# Altium PCB medusa-ai-integrated.PcbDoc (part 1 of 2)
Units mil, origin at the board's own origin, x right, y up, seen from the top; angles counter-clockwise.
Board outline 7750 x 7750 mil, 4 copper layers (Top Layer, Layer 1, Layer 2, Bottom Layer), stack 23.756 mil thick; 101 components, 83 nets, 484 pads, 157 vias.
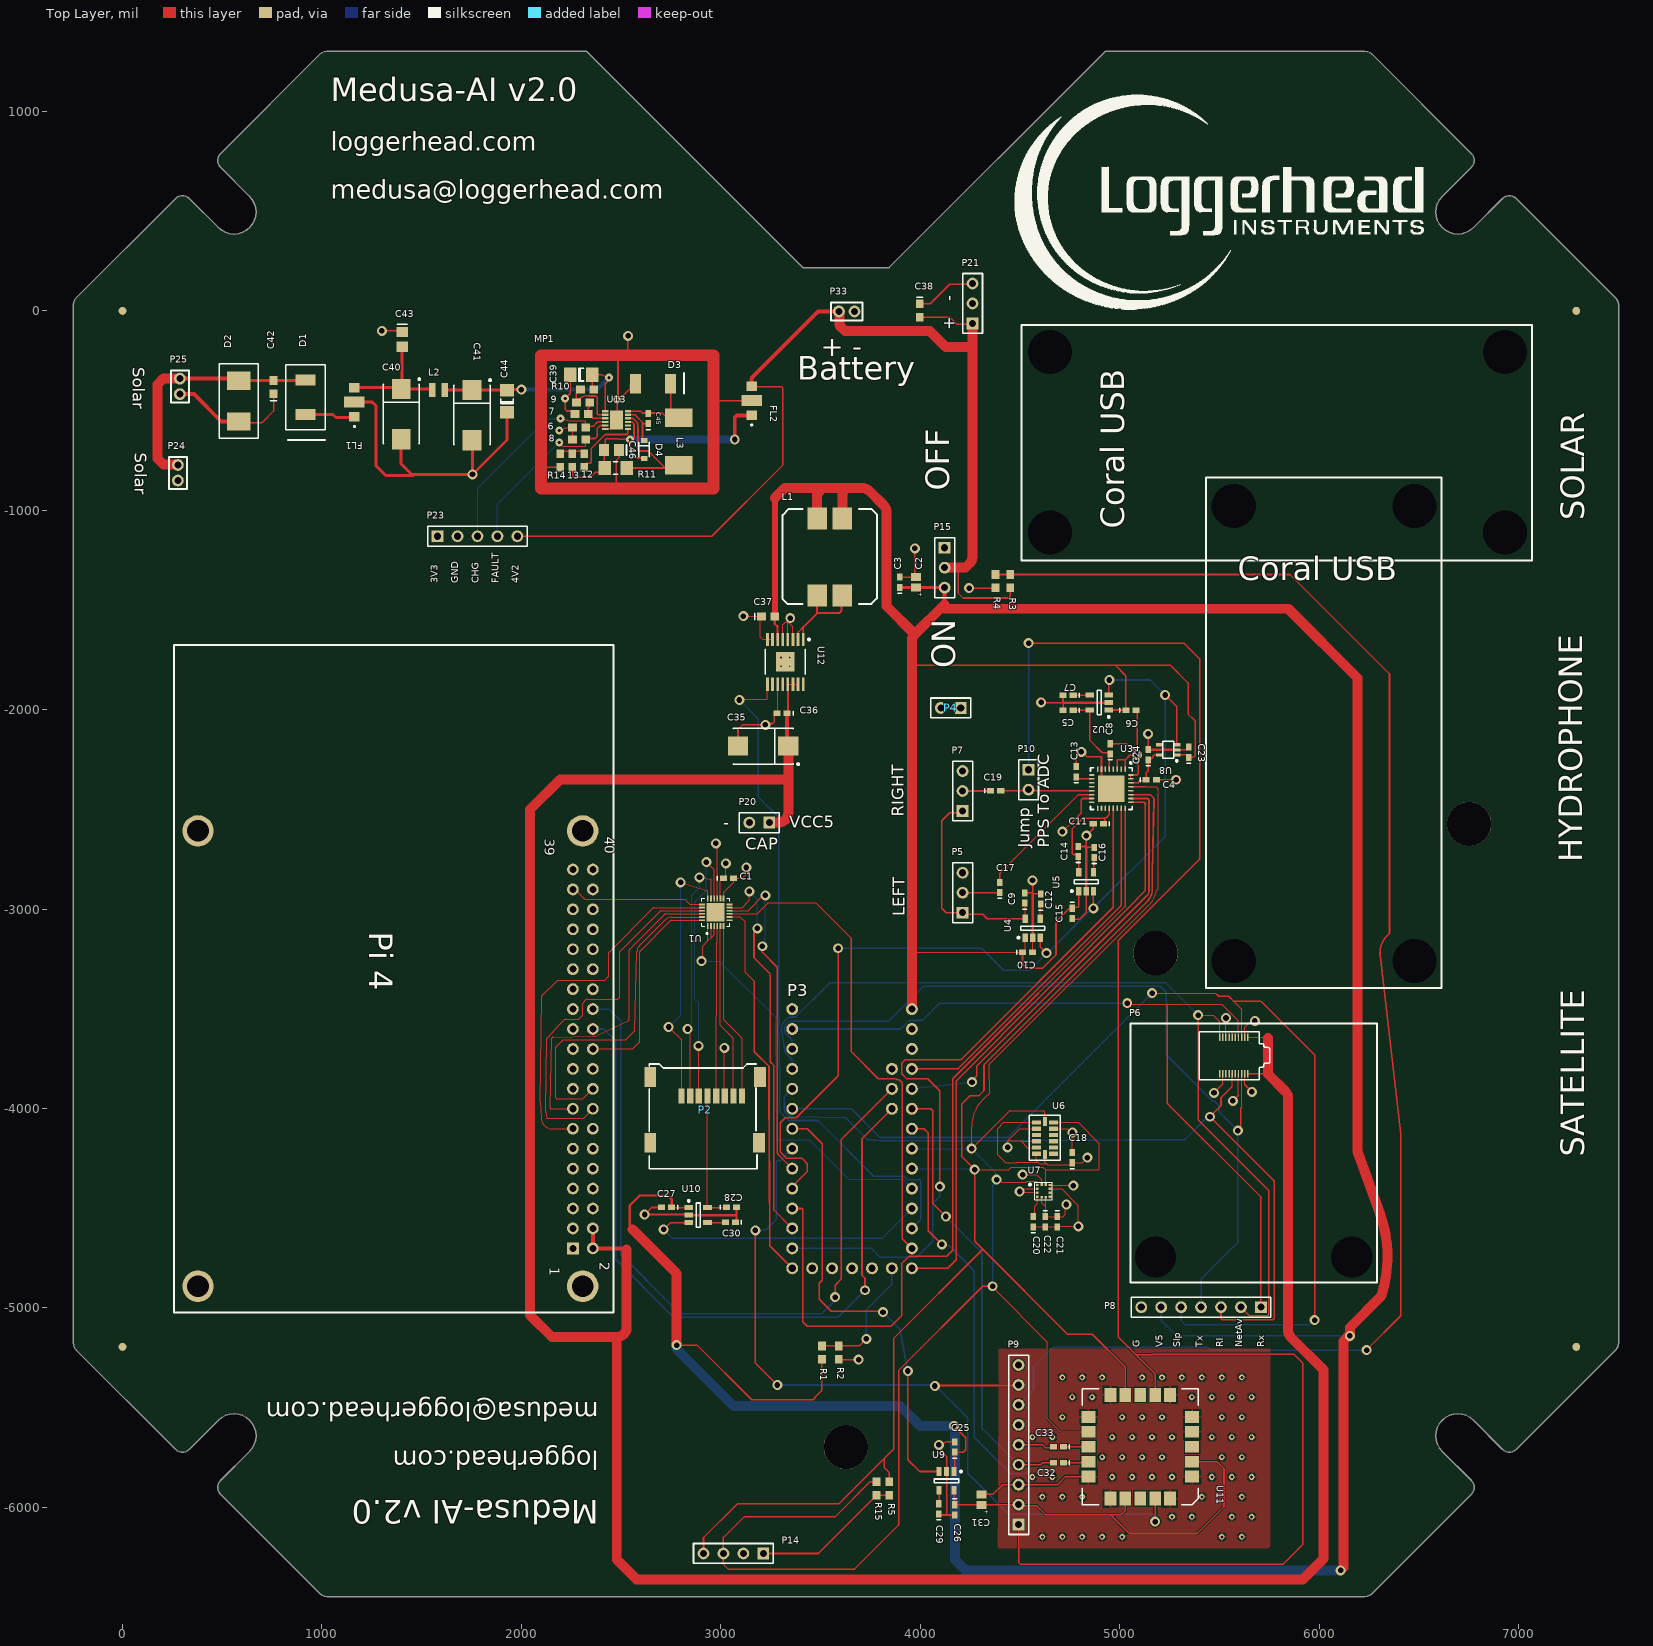
[diagram p0: Top Layer view]
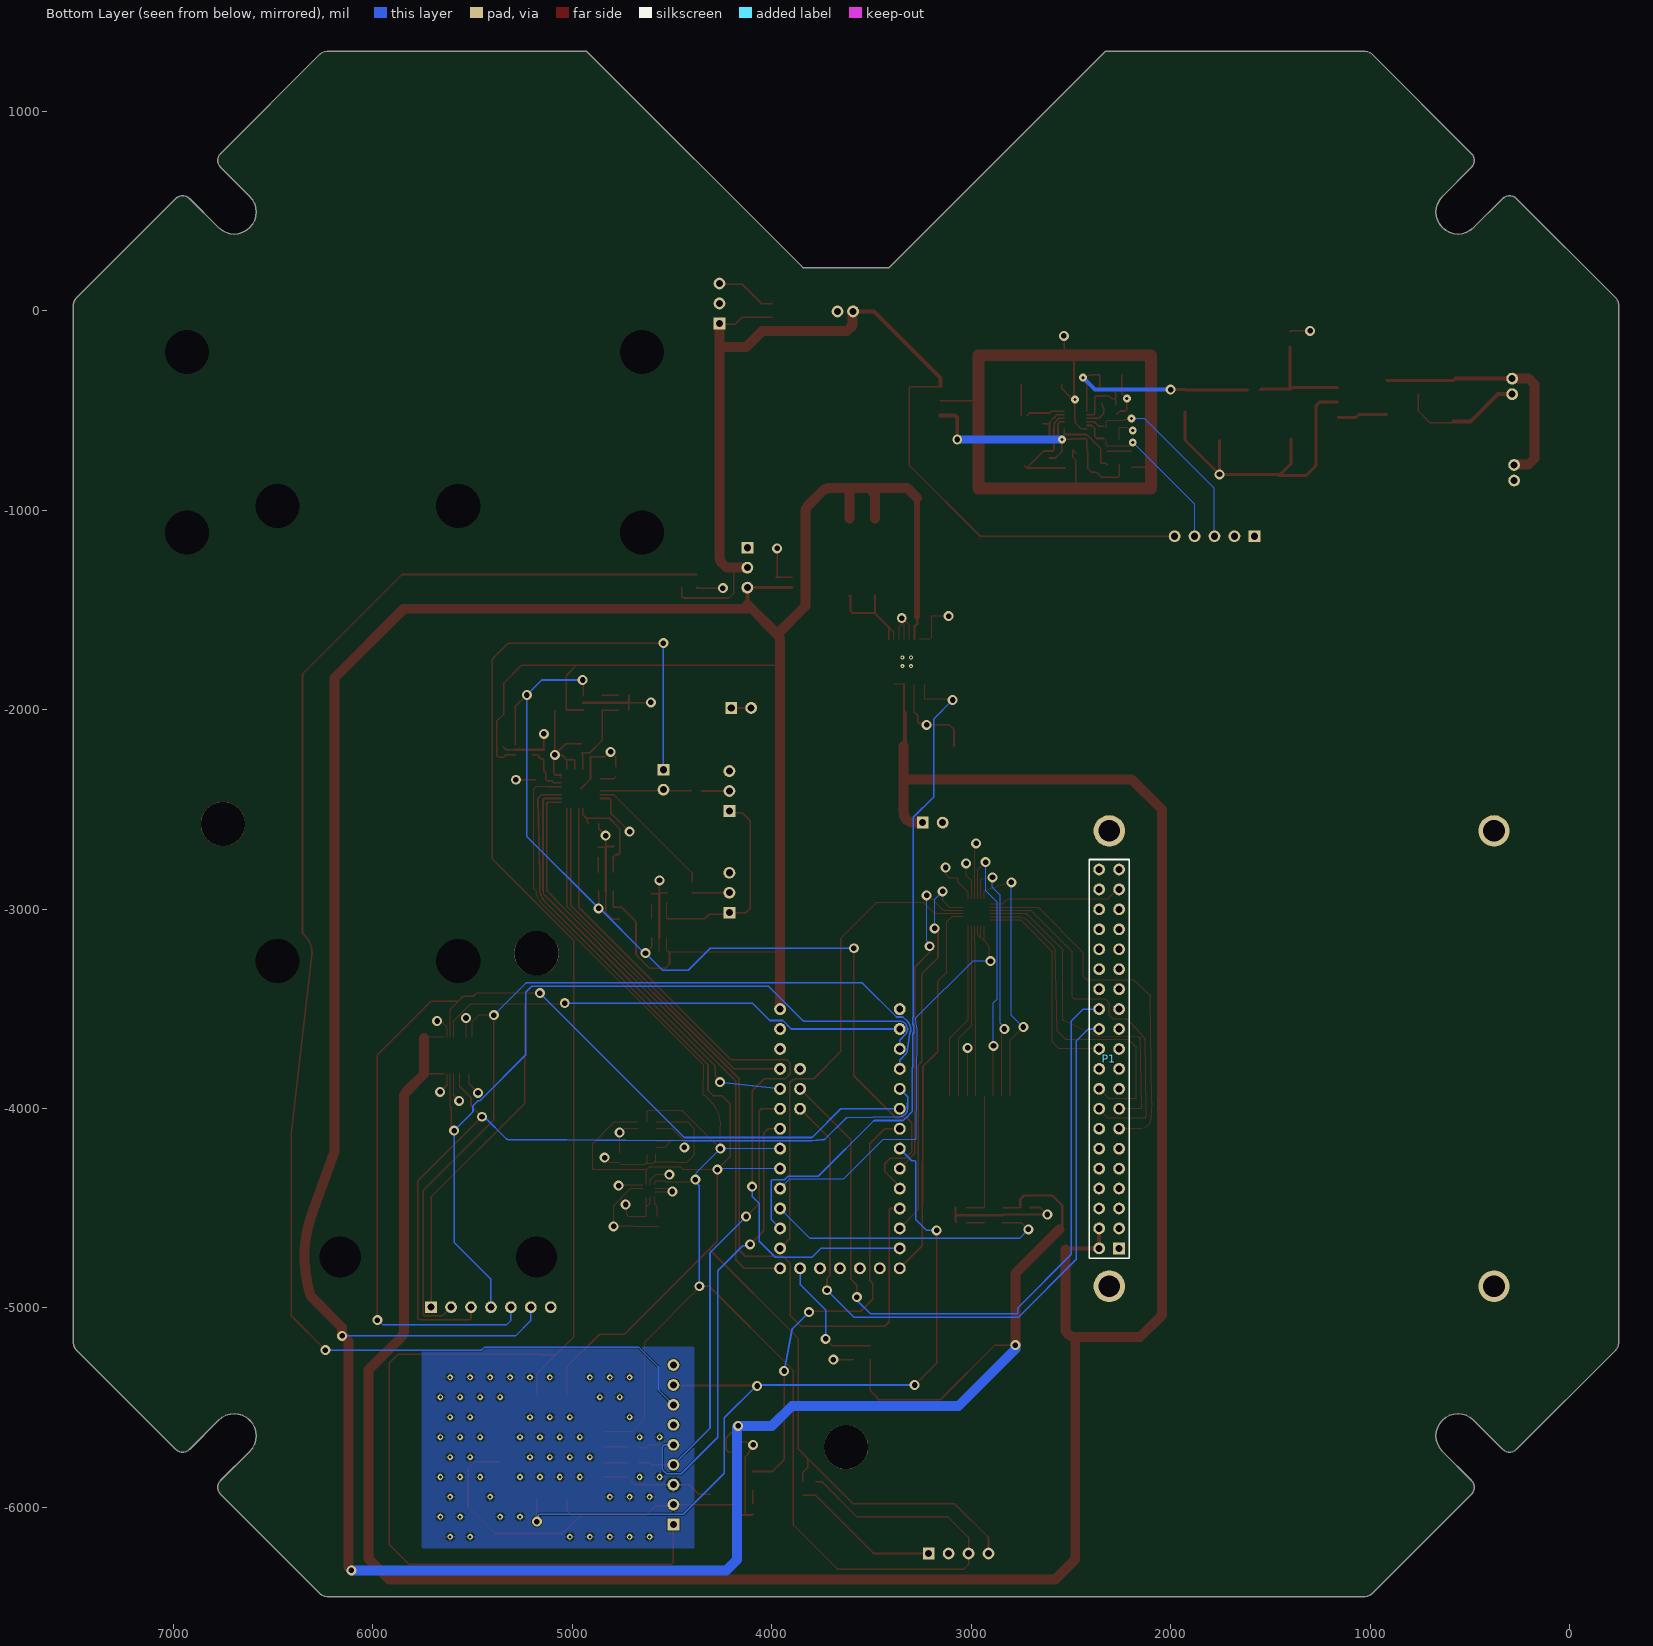
[diagram p1: Bottom Layer view, seen from below]
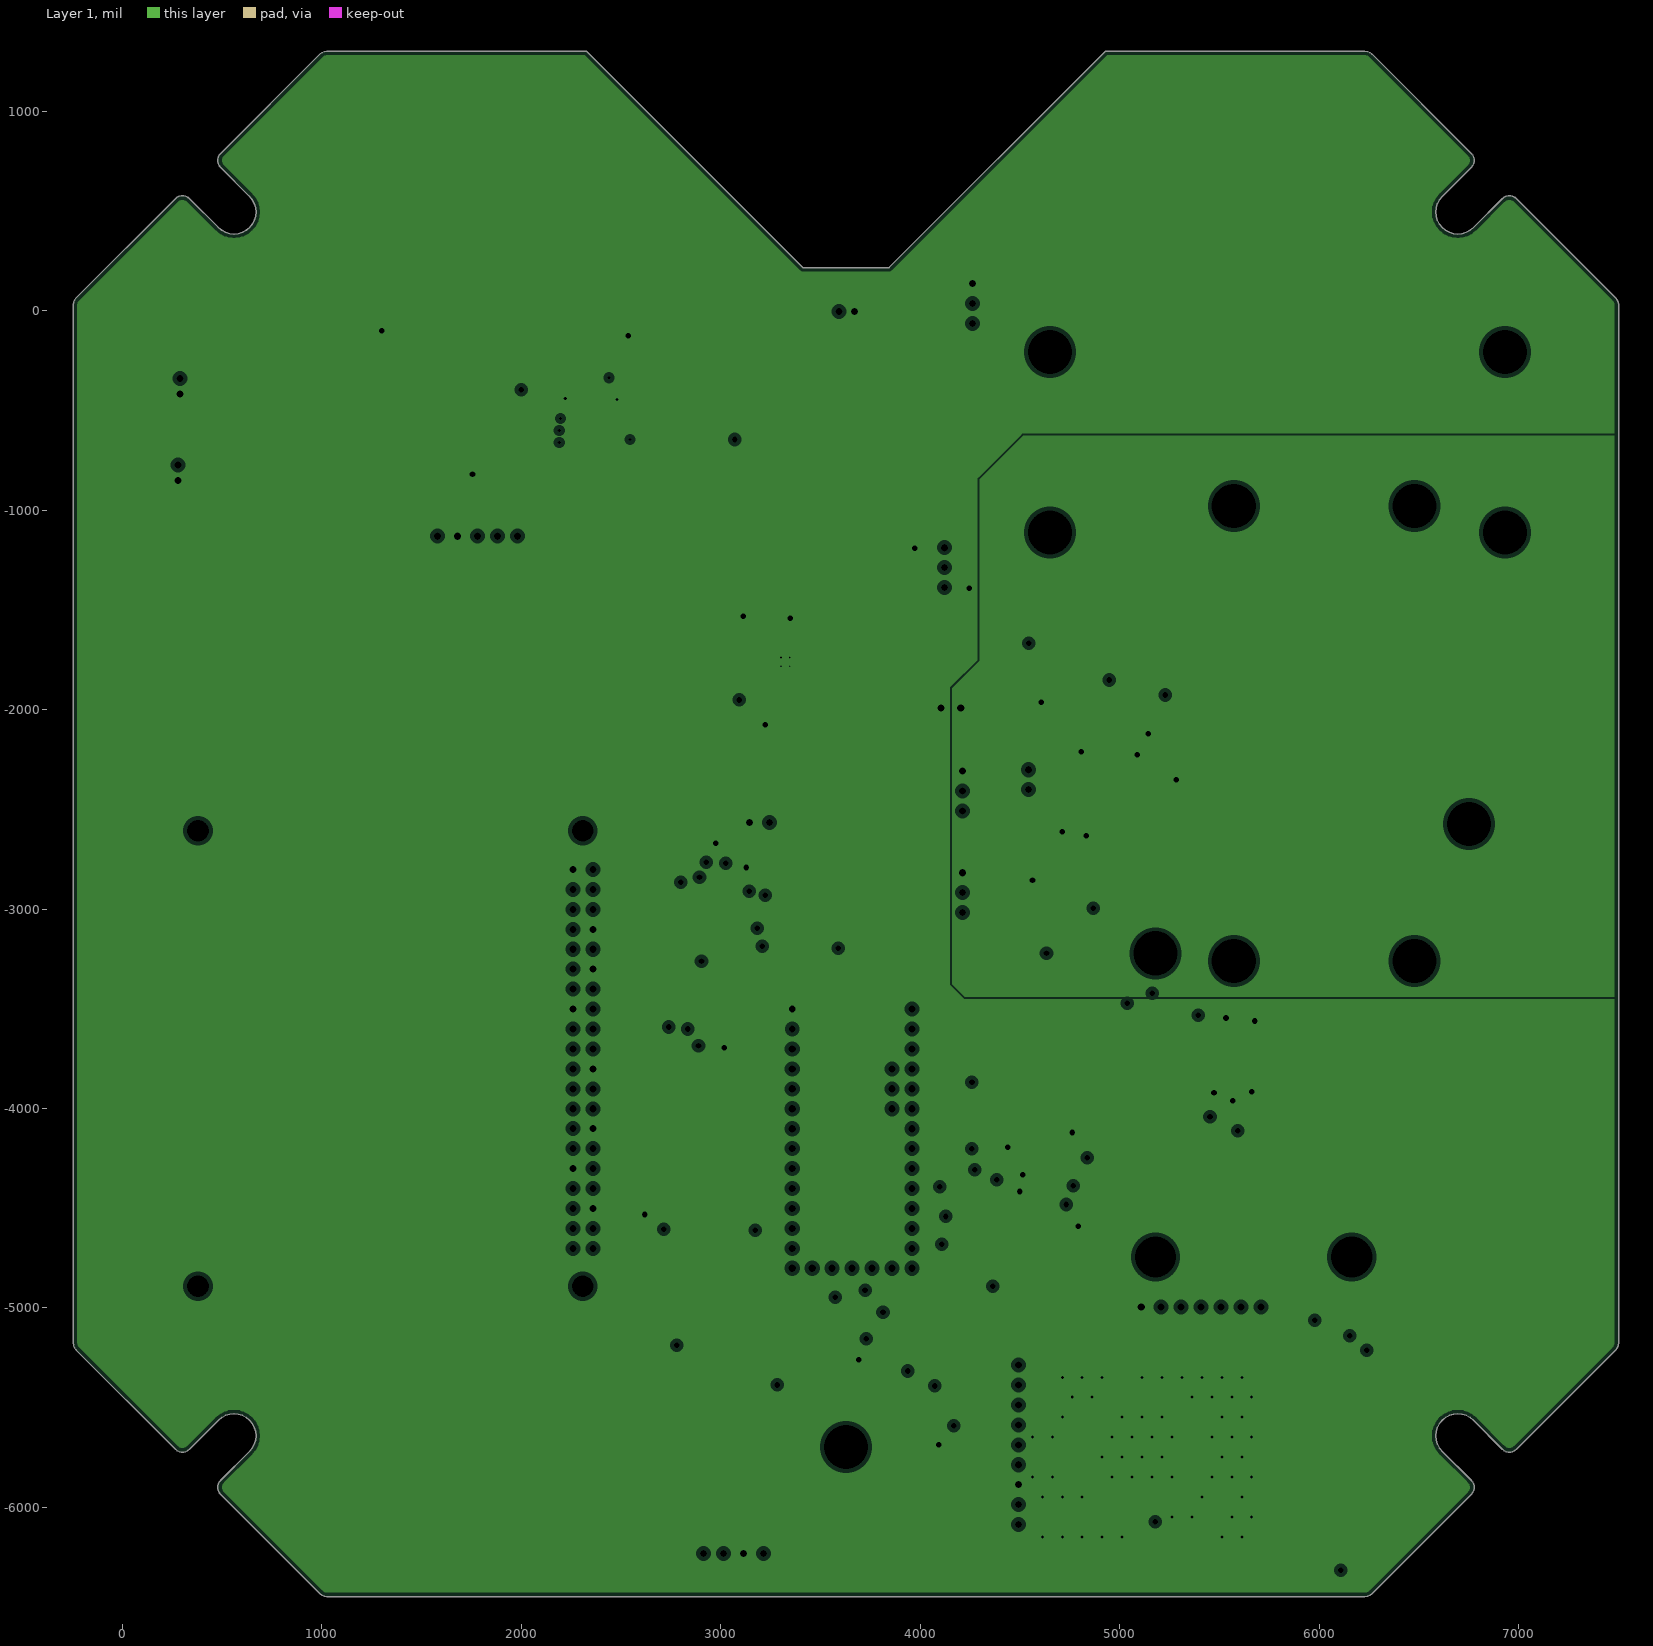
[diagram p2: Layer 1, clearances drawn from the general rule]
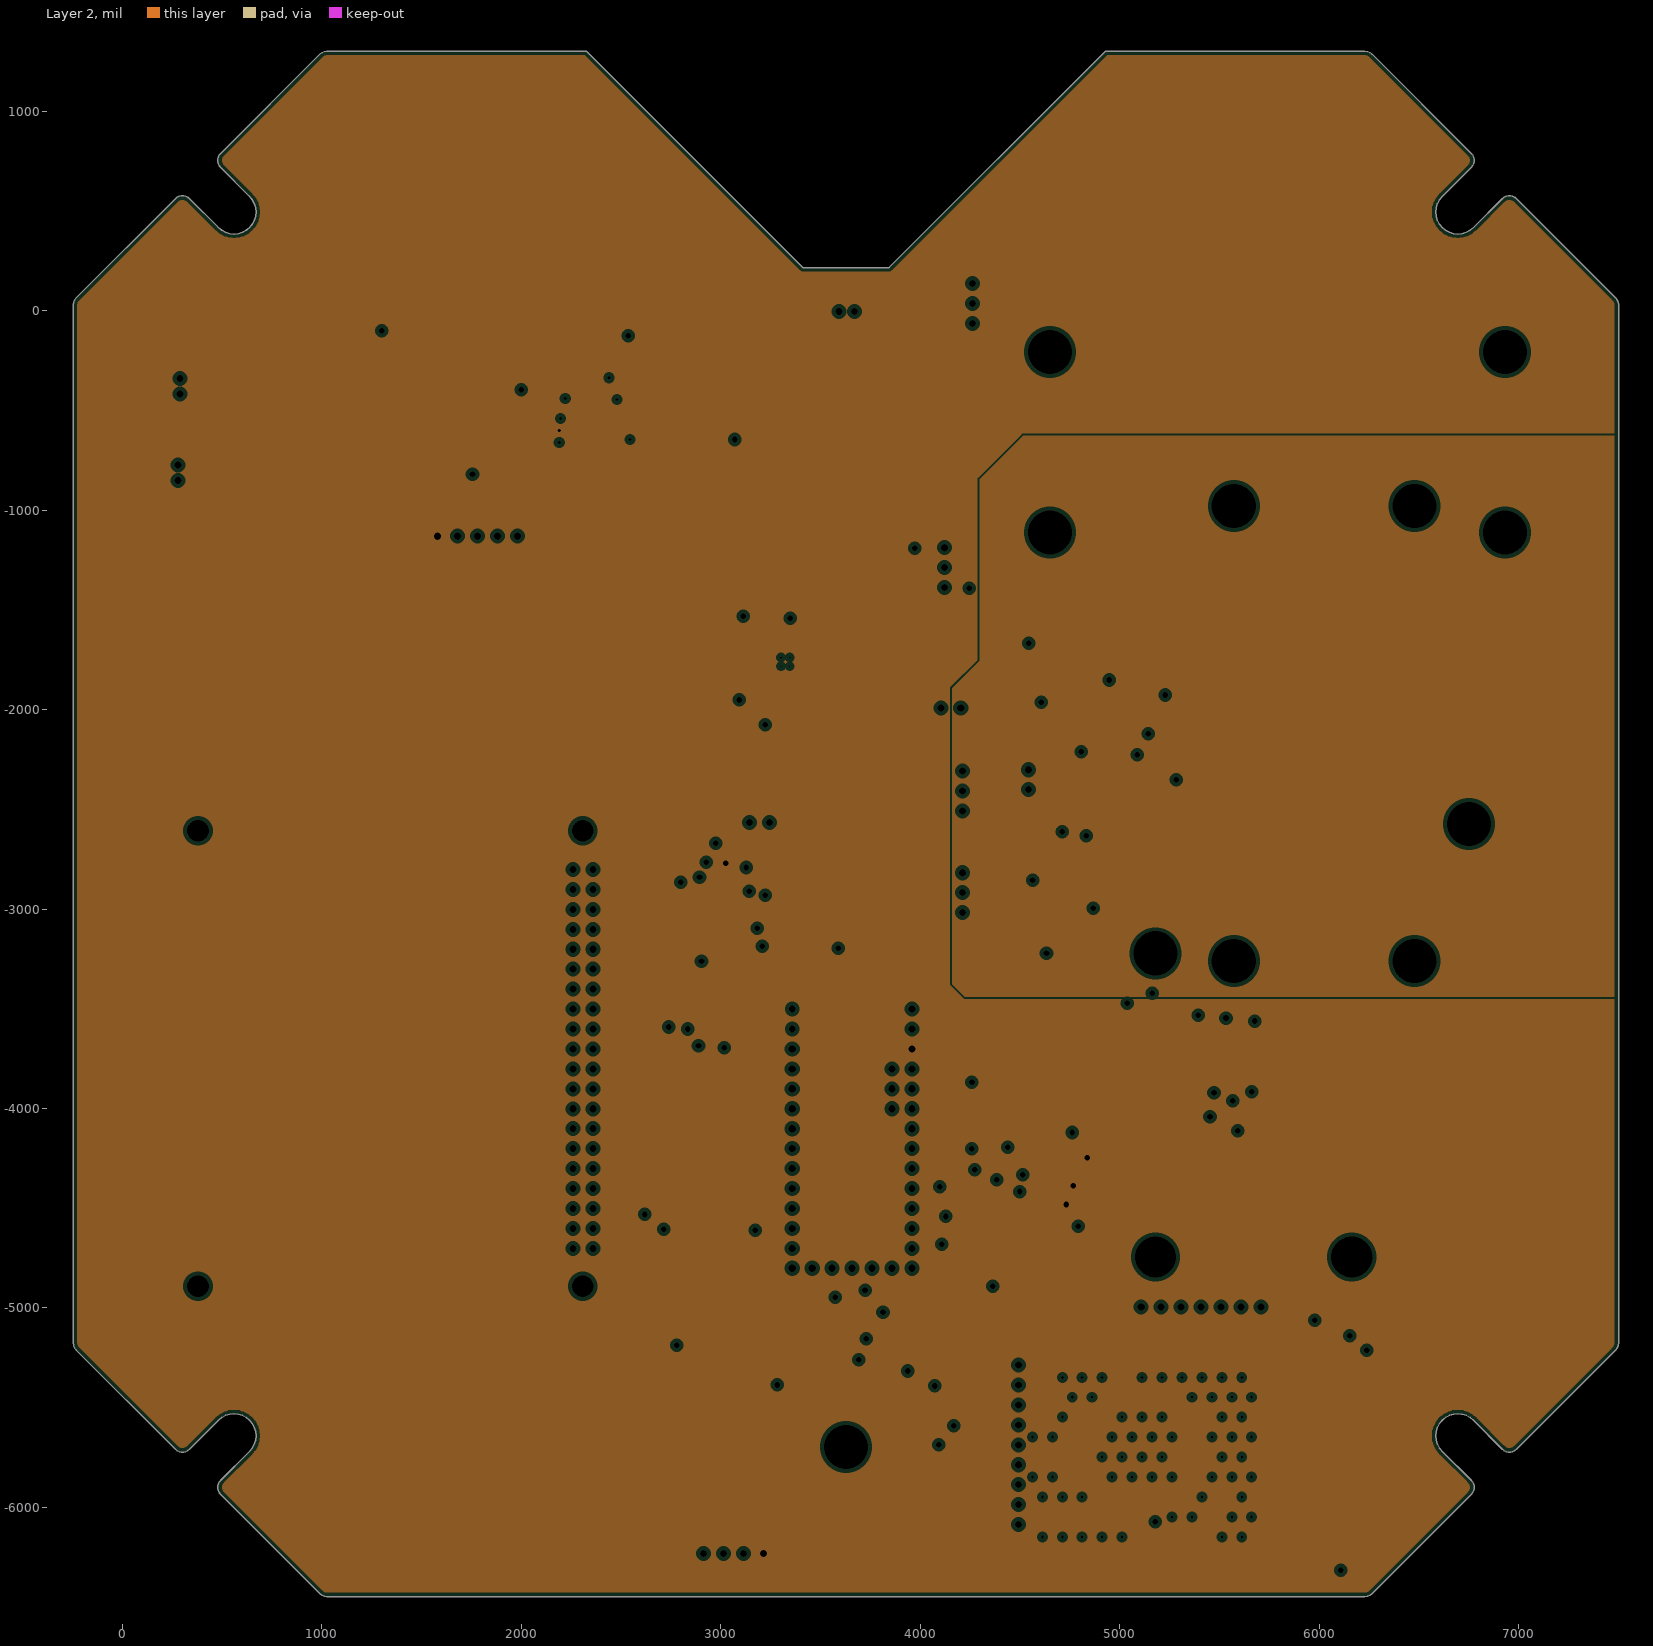
[diagram p3: Layer 2, clearances drawn from the general rule]

## Layer stack, top to bottom
Top Solder: solder mask 0.4, Solder Resist, Dk 3.5
Top Layer: signal copper 1.4
Dielectric 2: prepreg 2.8, PP-006, Dk 4.1
Layer 1: plane copper 1.378, net DGND
Dielectric 1: dielectric 12.6, FR-4, Dk 4.8
Layer 2: plane copper 1.378, net 3V3
Dielectric 3: prepreg 2.8, PP-006, Dk 4.1
Bottom Layer: signal copper 1.4
Bottom Solder: solder mask 0.4, Solder Resist, Dk 3.5

## Board outline
477.66,-5894.11 480.16,-5883.2 485.01,-5873.11 491.99,-5864.36 637.15,-5719.2 650.89,-5702.46 661.1,-5683.36 667.39,-5662.63 669.51,-5641.07 667.39,-5619.51 661.1,-5598.78 650.89,-5579.68 637.15,-5562.93 620.4,-5549.19 601.3,-5538.98 580.57,-5532.69 559.01,-5530.57 537.45,-5532.69 516.72,-5538.98 497.62,-5549.19 480.87,-5562.93 335.72,-5708.08 326.97,-5715.07 316.88,-5719.92 305.97,-5722.42 294.77,-5722.42 283.85,-5719.92 273.77,-5715.07 265.01,-5708.08 -232.91,-5210.16 -240.86,-5199.8 -245.86,-5187.74 -247.56,-5174.8 -247.56,29.53 -245.86,42.47 -240.86,54.53 -232.91,64.88 265.01,562.81 273.77,569.79 283.85,574.65 294.77,577.14 305.97,577.14 316.88,574.65 326.97,569.79 335.72,562.81 480.87,417.66 497.62,403.92 516.72,393.7 537.45,387.42 559.01,385.29 580.57,387.42 601.3,393.7 620.4,403.92 637.14,417.66 650.89,434.4 661.1,453.51 667.39,474.24 669.51,495.79 667.39,517.35 661.1,538.08 650.89,557.18 637.14,573.93 491.99,719.08 485.01,727.83 480.16,737.92 477.66,748.84 477.66,760.03 480.16,770.95 485.01,781.04 491.99,789.79 989.92,1287.72 1000.28,1295.66 1012.34,1300.66 1025.28,1302.36 2326.36,1302.36 3411.36,217.36 3843.52,217.36 4928.52,1302.36 6229.61,1302.36 6242.55,1300.66 6254.61,1295.66 6264.96,1287.72 6762.89,789.79 6769.87,781.04 6774.73,770.95 6777.22,760.03 6777.22,748.84 6774.73,737.92 6769.87,727.83 6762.89,719.08 6617.74,573.93 6603.99,557.18 6593.78,538.08 6587.5,517.35 6585.37,495.79 6587.5,474.24 6593.78,453.51 6603.99,434.4 6617.74,417.66 6634.48,403.92 6653.59,393.71 6674.31,387.42 6695.87,385.29 6717.43,387.42 6738.16,393.71 6757.26,403.92 6774.01,417.66 6919.16,562.81 6927.91,569.79 6938,574.65 6948.92,577.14 6960.11,577.14 6971.03,574.65 6981.12,569.79 6989.87,562.81 7487.8,64.88 7495.74,54.53 7500.74,42.47 7502.44,29.53 7502.44,-5174.8 7500.74,-5187.74 7495.74,-5199.8 7487.8,-5210.16 6989.87,-5708.08 6981.12,-5715.07 6971.03,-5719.92 6960.11,-5722.41 6948.92,-5722.41 6938,-5719.92 6927.91,-5715.07 6919.16,-5708.08 6774.01,-5562.93 6757.26,-5549.19 6738.16,-5538.98 6717.43,-5532.69 6695.87,-5530.57 6674.32,-5532.69 6653.59,-5538.98 6634.48,-5549.19 6617.74,-5562.93 6604,-5579.68 6593.78,-5598.78 6587.5,-5619.51 6585.37,-5641.07 6587.5,-5662.63 6593.78,-5683.36 6604,-5702.46 6617.74,-5719.2 6762.89,-5864.35 6769.87,-5873.11 6774.73,-5883.2 6777.22,-5894.11 6777.22,-5905.31 6774.73,-5916.22 6769.87,-5926.31 6762.89,-5935.07 6264.96,-6432.99 6254.61,-6440.94 6242.55,-6445.93 6229.61,-6447.64 1025.28,-6447.64 1012.34,-6445.93 1000.28,-6440.94 989.92,-6432.99 491.99,-5935.07 485.01,-5926.31 480.16,-5916.22 477.66,-5905.31

## Design rules (kind name [scope] priority, off if disabled: settings)
Clearance [All] p1: gap=5 ignorepadtopadclearanceinfootprint=FALSE except(0: Arc-Hole Track-Hole SMDPad-Hole THPad-Hole Via-Hole Fill-Hole Poly-Hole Region-Hole Text-Hole; 8: Arc-Arc Arc-Track Track-Track)
HoleSize [All] p1: absolutevalues=TRUE maxlimit=300 minlimit=1 maxpercent=80.000 minpercent=20.000
MinimumSolderMaskSliver [All] p1: minsoldermaskwidth=2
PlaneClearance [All] p1: clearance=20
PlaneConnect [All] p1: planeconnectstyle=Relief reliefexpansion=20 reliefentries=4 reliefconductorwidth=10 reliefairgap=10
PolygonConnect [All] p1: connectstyle=Relief reliefconductorwidth=10 reliefentries=4 polygonreliefangle="90 Angle" airgapwidth=10
RoutingVias [All] p1: holewidth=28 width=50 viastyle="Through Hole" minholewidth=28 minwidth=50 maxholewidth=28 maxwidth=50
SilkToSilkClearance [All] p1: silktosilkclearance=1
SolderMaskExpansion [All] p1: expansion=4 istentingtop=FALSE
Width [All] p1: maxlimit=100 minlimit=6 preferedwidth=8
25 further rules are at their usual default settings.

## Classes and differential pairs
component class medusa-ai-sensors: C18 C20 C21 C22 C31 C32 C33 P9 R3 R4 R5 R15 U6 U7 U11
component class medusa-charger: 6 7 8 9 12 13 C38 C39 C40 C41 C42 C43 C44 C45 C46 D1 D2 D3 D4 FL1 FL2 L2 L3 MP1 P21 P23 P24 P25 P33 R10 R11 R14 U13
component class medusa-ai-power: C25 C26 C27 C28 C29 C30 C35 C36 C37 L1 P20 U9 U10 U12
component class medusa-ai-integrated-charger: C1 C2 C3 P1 P2 P3 P6 P8 P14 P15 R1 R2 U1
component class medusa-ai-audio: C4 C5 C6 C7 C8 C9 C10 C11 C12 C13 C14 C15 C16 C17 C19 C23 C24 P4 P5 P7 P10 U2 U3 U4 U5 U8

## Components (designator, comment, footprint, x,y, rotation, side; value= is the part's Value field where it differs from the comment)
6 "330K" 3-0603 2290,-585 r0 top (schematic designator R6)
7 "51K" 3-0603 2302.44,-517.64 r0 top (schematic designator R7)
8 "330K" 3-0603 2290,-645 r0 top (schematic designator R8)
9 "51K" 3-0603 2310,-460 r0 top (schematic designator R9)
12 "205K" 3-0603 2315,-750 r270 top (schematic designator R12)
13 "64K9" 3-0603 2255,-750 r90 top (schematic designator R13)
C1 "0.1uF" 0402 3038.31,-2846.1 r0 top
C2 "10uF" Tant0805 3978.31,-1361.1 r270 top
C3 "0.1uF" 0402 3898.31,-1361.1 r90 top
C4 "0.1uF" 0402 5158.31,-2351.1 r0 top
C5 "0.1uF" 0402 4741.77,-2003.37 r180 top
C6 "1uF" 0402 5056.77,-2003.37 r0 top value=0.1uF
C7 "0.01uF" 0402 4741.77,-1928.37 r180 top value=0.1uF
C8 "0.1uF" 0402 4953.31,-2196.1 r90 top
C9 "0.1uF" 0402 4525.2,-2944.41 r90 top
C10 "1uF" 0402 4538.31,-3216.1 r0 top value=0.1uF
C11 "0.1uF" 0402 4893.31,-2571.1 r180 top
C12 "0.01uF" 0402 4605.2,-2949.41 r90 top value=0.1uF
C13 "0.1uF" 0402 4783.31,-2311.1 r90 top
C14 "0.1uF" 0402 4793.31,-2711.1 r90 top
C15 "1uF" 0402 4763.31,-3021.1 r270 top value=0.1uF
C16 "0.01uF" 0402 4873.31,-2716.1 r90 top value=0.1uF
C17 "1.0uF" 0402 4398.31,-2891.1 r90 top value=0.1uF
C18 "0.1uF" 0402 4763.31,-4246.1 r90 top
C19 "1.0uF" 0402 4378.31,-2406.1 r0 top value=0.1uF
C20 "100nF" 0402 4567.44,-4567.64 r90 top value=1.0uF
C21 "1.0uF" 0402 4687.44,-4567.64 r270 top
C22 "100nF" 0402 4627.44,-4567.64 r270 top value=1.0uF
C23 "1.0uF" 0402 5345.75,-2213.22 r90 top value=0.1uF
C24 "1.0uF" 0402 5143.31,-2226.1 r90 top value=0.1uF
C25 "1.0uF" 0402 4172.44,-5697.48 r90 top value=0.1uF
C26 "1.0uF" 0402 4172.44,-6012.48 r270 top value=0.1uF
C27 "1.0uF" 0402 2728.31,-4496.1 r180 top value=0.1uF
C28 "1.0uF" 0402 3053.31,-4496.1 r0 top value=0.1uF
C29 "10nF" 0402 4092.44,-6007.48 r90 top value=0.1uF
C30 "10nF" 0402 3048.31,-4571.1 r180 top value=0.1uF
C31 "1uF" Tant0805 4308.31,-5961.1 r270 top
C32 "0402 Ferrite" 0402 4693.31,-5776.1 r180 top value=100pF
C33 "0402 Ferrite" 0402 4693.31,-5696.1 r180 top value=100pF
C35 "T495X227K010ATE050" X 3212.44,-2182.64 r180 top value=220uF
C36 "2.2uF" 0402 3307.44,-2017.64 r180 top
C37 "C0603" 0603 3237.44,-1532.64 r0 top value=10uF
C38 "C0603" 0603 3997.44,2.36 r270 top
C39 "C1206" 1206 2300,-320 r0 top
C40 "T495X" X 1397.44,-517.64 r270 top value=47uF
C41 "T495X" X 1752.44,-522.64 r270 top value=47uF
C42 "C0603" 0603 757.44,-382.64 r90 top
C43 "C0805" 0805 1402.44,-142.64 r270 top value=4.7uF
C44 "C1206" 1206 1927.44,-452.64 r90 top
C45 "C0402" 0402 2635,-540 r90 top value=1uF
C46 "C0805" 0805 2452.44,-697.64 r180 top
D1 "PMEG3050EP*" Diode_PMEG3050EP 917.44,-432.64 r270 top
D2 "26.7V Breakdown" SMBJ24CA 582.44,-452.64 r270 top
D3 "PMEG3050EP*" Diode_PMEG3050EP 2660,-365 r0 top
D4 "BAT46WJ" SOD-323 2615,-695 r270 top
FL1 "YFF31HC2A105MT000N" FIL_YFF31HC2A105MT000N 1162.44,-457.64 r90 top
FL2 "YFF31HC2A105MT000N" FIL_YFF31HC2A105MT000N 3155,-450 r90 top
L1 "6.8uH" "Inductor - duplicate" 3483.31,-1426.1 r180 top
L2 "Inductor2016" Inductor2016 1552.44,-397.64 r0 top value=0.47uH
L3 "10uH" Inductor0630CDMCD 2790,-655 r270 top
MP1 "MS223-10F" MS223-10F 2530,-554.59 r180 top
P1 "Header 20X2" HDR2X20 2258.31,-4701.1 r90 bottom
P2 "microSD-Molex" microSD_Molex_hinged 3176.42,-3841.61 r270 top
P3 "Teensy3.x" Teensy3.x 3358.31,-3701.1 r180 top
P4 "GND Tie" HDR1X2 4203.31,-1991.1 r180 top
P5 "HYDROPHONE L" HDR1X3 4212.44,-3017.64 r90 top
P6 "Iridiuim9603" Iridium9603 5643.31,-3642.24 r180 top
P7 "HYDROPHONE R" HDR1X3 4212.44,-2507.64 r90 top
P8 "Iridium" HDR1X7 5708.31,-4996.1 r180 top
P9 "GPS" HDR1X9 4493.31,-6086.1 r90 top
P10 "Jumper PPS to Audio R" HDR1X2 4543.31,-2301.1 r270 top
P14 "Header 4" HDR1X4 3213.31,-6231.1 r180 top
P15 "switch" HDR1X3 4122.44,-1187.64 r270 top
P20 "UltraCap" HDR1X2 3243.31,-2566.1 r180 top
P21 "3000uF" HDR1X3 4262.44,-62.64 r90 top
P23 "Medusa Interface" HDR1X5 1580,-1130 r0 top
P24 "SOLAR" HDR_2x1_2mm 277.44,-772.01 r180 top
P25 "SOLAR" HDR_2x1_2mm 287.44,-338.9 r180 top
P33 "BAT" HDR_2x1_2mm 3591.81,-2.64 r270 top
R1 "100k" 3-0603 3506.69,-5223.9 r270 top
R2 "100k" 3-0603 3591.69,-5223.9 r90 top
R3 "100k" 3-0603 4451.69,-1355.43 r270 top
R4 "100k" 3-0603 4376.69,-1355.43 r90 top
R5 "4.7k" 3-0603 3845,-5905 r270 top
R10 "301K" 3-0603 2330,-395 r180 top
R11 "50mOhms" 8-1206 2472.44,-787.64 r180 top
R14 "330K" 3-0603 2195,-750 r90 top
R15 "4.7k" 3-0603 3780,-5905 r270 top
U1 "MAX4996ETG+" QFN40P350X350X80-25N 2974.57,-3015.75 r90 top
U2 "LP3985IM5-3.3" MF05A_N 4898.31,-1964.24 r180 top
U3 "SGTL5000" QFN32 4958.31,-2396.1 r270 top
U4 "LP3985IM5-3.3" MF05A_N 4564.33,-3095.94 r90 top
U5 "LP3985IM5-3.3" MF05A_N 4832.44,-2862.64 r90 top
U6 "ADXL343" ADXL345 4582.44,-4069.65 r0 top
U7 "LIS3MDL" LGA-12 4587.44,-4383.27 r0 top
U8 "TLV70018DCKR" TI-DCK5_V 5243.31,-2201.1 r180 top
U9 "LP3985IM5-3.3" MF05A_N 4132.44,-5867.48 r270 top
U10 "LP3985IM5-3.3" MF05A_N 2886.42,-4534.57 r0 top
U11 "SAM-M8Q" "GPS SAM-MQ8" 5363.31,-5845.51 r180 top
U12 "TPS61032" TPS6103x 3323.46,-1759.84 r270 top
U13 "LT3652EDDPBF" DFN300X300X80-13N 2477.44,-547.64 r0 top

## Footprints (in the part's own frame and the unit in brackets; to place one, negate y for a bottom-side part, rotate by r counter-clockwise, add the part's x,y. Pads: shape width x height; smd on the part's side, far side on the other; paste and mask are expansions set on the pad)
3-0603 [mm] "Chip Resistor; Body 1.6 x 0.9 mm (LxW typ)"
  rect 1.1x1 smd: 1(-0.85,0) 2(0.85,0)
8-1206 [mm] "Chip Resistor; Body 3.1 x 1.6 mm (LxW typ)"
  rect 1.6x1.8 smd: 1(-1.4,0) 2(1.4,0)
  silkscreen extent -0.3,-0.8 0.3,0.8
0402 [mm] "Chip Capacitor; Body 1.0 x 0.5 mm (LxW typ)"
  rect 0.9x0.7 smd: 1(-0.65,0) 2(0.65,0)
  silkscreen extent -1.4,-0.25 -1.4,0.25
0603 [mm] "Chip Capacitor; Body 1.6 x 0.8 mm (LxW typ)"
  rect 1.1x1 smd: 1(-0.85,0) 2(0.85,0)
  silkscreen extent -1.7,-0.4 -1.7,0.4
0805 [mm] "Chip Capacitor; Body 2.0 x 1.2 mm (LxW typ)"
  rect 1.3x1.5 smd: 1(-0.95,0) 2(0.95,0)
  silkscreen extent -1.9,-0.65 -1.9,0.65
1206 [mm] "Chip Capacitor; Body 3.2 x 1.6 mm (LxW typ)"
  rect 1.6x1.8 smd: 1(-1.4,0) 2(1.4,0)
  silkscreen extent -0.3,-0.8 0.3,0.8
ADXL345 [mm] "Digital Accelerometer"
  rect 1.145x0.55 smd: 1(0,0) 2(0,-0.8) 3(0,-1.6) 4(0,-2.4) 5(0,-3.2) 6(0,-4) 8(2.195,-4) 9(2.195,-3.2) 10(2.195,-2.4) 11(2.195,-1.6) 12(2.195,-0.8) 13(2.195,0)
  rect 0.55x1.145 smd: 7(1.098,-4.098) 14(1.098,0.098)
  silkscreen extent -0.89,-4.83 3.05,0.89
DFN300X300X80-13N [mil]
  rect 32x11 smd: 1(-57,44) 2(-57,27) 3(-57,9) 4(-57,-9) 5(-57,-27) 6(-57,-44) 7(57,-44) 8(57,-27) 9(57,-9) 10(57,9) 11(57,27) 12(57,44)
  rect 65x94 smd: 13(0,0)
Diode_PMEG3050EP [mm]
  rect 1.4x2.5 smd: A(-2.2,0) K(2.2,0)
  silkscreen extent -4.15,-2.5 5.45,2.5
FIL_YFF31HC2A105MT000N [mm]
  rect 1.2x1.3 smd mask+0: 1(-1.85,0) 3(1.85,0)
  rect 1.4x2.6 smd paste-2 mask+0: 2_4(0,0)
  silkscreen extent -3.2,-0.1 -3,0.1, body extent -1.6,-0.8 1.6,0.8, height 1.5
"GPS SAM-MQ8" [mm]
  rect 1.8x1.5 smd paste-0.25: 1(0,0) 2(0,-1.9) 3(0,-3.8) 4(0,-5.7) 5(0,-7.6) 11(13.2,-7.6) 12(13.2,-5.7) 13(13.2,-3.8) 14(13.2,-1.9) 15(13.2,0)
  rect 1.5x1.8 smd paste-0.25: 6(2.8,-10.4) 7(4.7,-10.4) 8(6.6,-10.4) 9(8.5,-10.4) 10(10.4,-10.4) 16(10.4,2.8) 17(8.5,2.8) 18(6.6,2.8) 19(4.7,2.8) 20(2.8,2.8)
  silkscreen extent -0.8,-11.2 14,3.6
HDR1X2 [mm] "Connector; Header; 2 Position"
  rect 1.5x1.5 hole 0.9: 1(0,0)
  round 1.5 hole 0.9: 2(2.54,0)
  silkscreen extent -1.27,-1.27 3.81,1.27
HDR1X3 [mm] "Connector; Header; 3 Position"
  rect 1.5x1.5 hole 0.9: 1(0,0)
  round 1.5 hole 0.9: 2(2.54,0) 3(5.08,0)
  silkscreen extent -1.27,-1.27 6.35,1.27
HDR1X4 [mm] "Connector; Header; 4 Position"
  rect 1.5x1.5 hole 0.9: 1(0,0)
  round 1.5 hole 0.9: 2(2.54,0) 3(5.08,0) 4(7.62,0)
  silkscreen extent -1.27,-1.27 8.89,1.27
HDR1X5 [mm] "Connector; Header; 5 Position"
  rect 1.5x1.5 hole 0.9: 1(0,0)
  round 1.5 hole 0.9: 2(2.54,0) 3(5.08,0) 4(7.62,0) 5(10.16,0)
  silkscreen extent -1.27,-1.27 11.43,1.27
HDR1X7 [mm] "Connector; Header; 7 Position"
  rect 1.5x1.5 hole 0.9: 1(0,0)
  round 1.5 hole 0.9: 2(2.54,0) 3(5.08,0) 4(7.62,0) 5(10.16,0) 6(12.7,0) 7(15.24,0)
  silkscreen extent -1.27,-1.27 16.51,1.27
HDR1X9 [mm] "Connector; Header; 9 Position"
  rect 1.5x1.5 hole 0.9: 1(0,0)
  round 1.5 hole 0.9: 2(2.54,0) 3(5.08,0) 4(7.62,0) 5(10.16,0) 6(12.7,0) 7(15.24,0) 8(17.78,0) 9(20.32,0)
  silkscreen extent -1.27,-1.27 21.59,1.27
HDR2X20 [mm] "Connector; Header; 20x2 Position"
  rect 1.5x1.5 hole 0.9: 1(0,0)
  round 1.5 hole 0.9: 2(0,2.54) 3(2.54,0) 4(2.54,2.54) 5(5.08,0) 6(5.08,2.54) 7(7.62,0) 8(7.62,2.54) 9(10.16,0) 10(10.16,2.54) 11(12.7,0) 12(12.7,2.54) 13(15.24,0) 14(15.24,2.54) 15(17.78,0) 16(17.78,2.54) 17(20.32,0) 18(20.32,2.54) 19(22.86,0) 20(22.86,2.54) 21(25.4,0) 22(25.4,2.54) 23(27.94,0) 24(27.94,2.54) 25(30.48,0) 26(30.48,2.54) 27(33.02,0) 28(33.02,2.54) 29(35.56,0) 30(35.56,2.54) 31(38.1,0) 32(38.1,2.54) 33(40.64,0) 34(40.64,2.54) 35(43.18,0) 36(43.18,2.54) 37(45.72,0) 38(45.72,2.54) 39(48.26,0) 40(48.26,2.54)
  silkscreen extent -1.27,-1.27 49.53,3.81
HDR_2x1_2mm [mm]
  round 1.5 hole 0.9: 1(0,0.016) 2(0,2)
  silkscreen extent -1.14,-1.02 1.14,3.05
Inductor0630CDMCD [mm]
  rect 2.35x3.5 smd: 1(-3.025,0) 2(3.025,0)
Inductor2016 [mm]
  rect 0.8x1.8 smd: 1(0,0) 2(1.6,0)
"Inductor - duplicate" [mm] "Sumida Inductor"
  rect 2.45x2.8 smd: 1(-3.2,0) 1(0,0) 2(-3.2,-9.8) 2(0,-9.8)
  silkscreen extent -7.6,-11 4.4,1.1
Iridium9603 [mm]
  round 1.524 hole 5.25: 0(-13.222,28.01) 0(11.768,28.01)
  rect 0.18x0.93 smd paste-0.02 mask+0.05: 1(0,0) 2(0,4.67) 3(0.4,0) 4(0.4,4.67) 5(0.8,0) 6(0.8,4.67) 7(1.2,0) 8(1.2,4.67) 9(1.6,0) 10(1.6,4.67) 11(2,0) 12(2,4.67) 13(2.4,0) 14(2.4,4.67) 15(2.8,0) 16(2.8,4.67) 17(3.2,0) 18(3.2,4.67) 19(3.6,0) 20(3.6,4.67)
  silkscreen extent -16.42,-1.73 14.98,31.27
LGA-12 [mm] "LIS2DS12"
  rect 0.35x0.3 smd: 1(0,0) 2(0,-0.5) 3(0,-1) 4(0,-1.5) 7(1.6,-1.5) 8(1.6,-1) 9(1.6,-0.5) 10(1.6,0)
  rect 0.3x0.35 smd: 5(0.55,-1.55) 6(1.05,-1.55) 11(1.05,0.05) 12(0.55,0.05)
  silkscreen extent -1.05,-1.85 1.9,0.35
MF05A_N [mm] "SOT23, 5-Leads, Body 2.9x1.6mm, Pitch 0.95mm, Lead Span 2.8mm, IPC Medium Density"
  rect 1.1x0.65 smd: 1(-1.2,0.95) 2(-1.2,0) 3(-1.2,-0.95) 4(1.2,-0.95) 5(1.2,0.95)
  silkscreen extent -1.33,-1.55 0.25,1.95, body extent -0.9,-1.55 0.9,1.55, height 1.19
microSD_Molex_hinged [mm]
  rect 2.5x1.5 smd: 0(0,0.508) 0(8.382,0.381)
  rect 2.5x1.45 smd: 0(0,-13.45) 0(8.382,-13.462)
  rect 1.9x0.8 smd: 1(2.4,-9.475) 2(2.4,-8.375) 3(2.4,-7.275) 4(2.4,-6.175) 5(2.4,-5.075) 6(2.4,-3.975) 7(2.4,-2.875) 8(2.4,-1.775)
  silkscreen extent -1.65,-13.59 11.68,0.13
MS223-10F [mil]
  Top Layer lines w59.06: 432.09,336.61 427.35,336.61 29.68,336.61 0,336.61 -56.18,336.61 -371.18,336.61 -426.18,336.61 -434.06,336.61 -434.06,335.41 -434.06,-109.59 -434.06,-331.91 -434.06,-332.68 -430.91,-332.68 -430.15,-332.68 -375,-332.68 -0.76,-332.68 0,-332.68 425.39,-332.68 432.09,-332.68 432.09,-331.91 432.09,230.41 432.09,335.41 432.09,336.61
QFN32 [mm]
  oval 0.7x0.2 smd: 1(-2.5,1.75) 2(-2.5,1.25) 3(-2.5,0.75) 4(-2.5,0.25) 5(-2.5,-0.25) 6(-2.5,-0.75) 7(-2.5,-1.25) 8(-2.5,-1.75) 17(2.5,-1.75) 18(2.5,-1.25) 19(2.5,-0.75) 20(2.5,-0.25) 21(2.5,0.25) 22(2.5,0.75) 23(2.5,1.25) 24(2.5,1.75)
  oval 0.2x0.7 smd: 9(-1.75,-2.5) 10(-1.25,-2.5) 11(-0.75,-2.5) 12(-0.25,-2.5) 13(0.25,-2.5) 14(0.75,-2.5) 15(1.25,-2.5) 16(1.75,-2.5) 25(1.75,2.5) 26(1.25,2.5) 27(0.75,2.5) 28(0.25,2.5) 29(-0.25,2.5) 30(-0.75,2.5) 31(-1.25,2.5) 32(-1.75,2.5)
  rect 3.4x3.4 smd paste-1.2: 33(0,0)
  silkscreen extent -3.42,-2.65 2.65,2.65, body extent -2.5,-2.5 2.5,2.5, height 1
QFN40P350X350X80-25N [mm]
  rrect6% 0.76x0.22 smd: 1(-1.73,1) 2(-1.73,0.6) 3(-1.73,0.2) 4(-1.73,-0.2) 5(-1.73,-0.6) 6(-1.73,-1) 13(1.73,-1) 14(1.73,-0.6) 15(1.73,-0.2) 16(1.73,0.2) 17(1.73,0.6) 18(1.73,1)
  rrect6% 0.22x0.76 smd: 7(-1,-1.73) 8(-0.6,-1.73) 9(-0.2,-1.73) 10(0.2,-1.73) 11(0.6,-1.73) 12(1,-1.73) 19(1,1.73) 20(0.6,1.73) 21(0.2,1.73) 22(-0.2,1.73) 23(-0.6,1.73) 24(-1,1.73)
  rect 2.3x2.3 smd paste-2: 25(0,0)
  silkscreen extent -2.8,-1.8 1.8,1.8
SMBJ24CA [mm]
  rect 2.3x3 smd: 1(-2.6,0) 2(2.6,0)
  silkscreen extent -4.75,-2.5 4.75,2.5
SOD-323 [mm]
  rect 0.63x0.83 smd: A(1.15,0) C(-1.15,0)
  silkscreen extent -0.9,-0.65 0.9,0.65
Tant0805 [mil]
  rect 40x50 smd: 1(-26.5,0) 2(26.5,0)
Teensy3.x [mil]
  round 60 hole 35: 0(0,-100) GND(0,-200)
  round 60 hole 36: 1(0,0) 2(0,100) 3(0,200) 3.3V2(-200,1100) 4(0,300) 5(0,400) 6(0,500) 7(0,600) 8(0,700) 9(0,800) 10(0,900) 11(0,1000) 12(0,1100) 13(-600,1100) 14(-600,1000) 15(-600,900) 16(-600,800) 17(-600,700) 18(-600,600) 19(-600,500) 20(-600,400) 21(-600,300) 22(-600,200) 23(-600,100) A10(-500,200) A11(-500,300) A14(-500,1100) AGND(-600,-100) AREF(-500,100) GND2(-300,1100) PGM(-400,1100) VBat(-100,1100) Vin(-600,-200)
  round 60 hole 36 paste+0: 3.3V(-600,0)
TI-DCK5_V [mm] "SOT23, 5-Leads, Body 2x1.25mm, Pitch 0.65mm"
  rect 0.9x0.4 smd: 1(-1.1,0.65) 2(-1.1,0) 3(-1.1,-0.65) 4(1.1,-0.65) 5(1.1,0.65)
  silkscreen extent -1.23,-1.07 0.7,1.52, body extent -0.63,-1 0.63,1, height 1.1
TPS6103x [mm] "TSOP, 16-Leads, Body 5.00x4.40mm, Pitch 0.65mm, Thermal Pad 2.31.2x2.46.2mm, IPC Medium Density"
  rect 1.7x0.35 smd: 1(-2.85,2.275) 2(-2.85,1.625) 3(-2.85,0.975) 4(-2.85,0.325) 5(-2.85,-0.325) 6(-2.85,-0.975) 7(-2.85,-1.625) 8(-2.85,-2.275) 9(2.85,-2.275) 10(2.85,-1.625) 11(2.85,-0.975) 12(2.85,-0.325) 13(2.85,0.325) 14(2.85,0.975) 15(2.85,1.625) 16(2.85,2.275)
  rect 2.46x2.31 smd: 17(0,0)
  silkscreen extent -2.97,-2.55 1.6,3.13, body extent -2.25,-2.55 2.25,2.55, height 1.2
X [mm] "Capacitor, SM Tantalum; Body 7.3 x 4.3 mm (LxW typ)"
  rect 2.6x2.4 smd: 1(-3.2,0) 2(3.2,0)
  silkscreen extent -4.58,-2.3 3.8,2.42

## Part data
6 7 8 9 12 13 R10 R14: library part ERJ3EK, "Precision Thick Film Chip Resistor, 10 Ohm to 1M Ohm Range, 1% and 0.5% Tolerance, 0603 Size, 0.063 W", PackageDocument=Mar-2003, Code_IPC="1608 [0603]", ComponentLink1Description="Manufacturer Link", ComponentLink1URL=http://www.panasonic.com/industrial/components/resistive_products.htm, ComponentLink2Description=Datasheet, ComponentLink2URL=http://www.panasonic.com/industrial/components/pdf/AOA0000CE2.pdf, LatestRevisionDate=19-Mar-2004, LatestRevisionNote="Silkscreen size reduced.", PackageReference=3-0603, Published=17-Dec-2003, Publisher="Altium Limited"
C1 C3 C4 C5 C6 C7 C8 C9 C10 C11 C12 C13 C14 C15 C16 C17 C18 C19 C20 C21 C22 C23 C24 C25 C26 C27 C28 C29 C30 C32 C33 C36: library part C0402, "Ceramic Chip Capacitor - Standard", PackageDocument=Mar-2001, Code_IPC="1005 [0402]", Code_JEITA=0402, ComponentLink1Description="Manufacturer Link", ComponentLink1URL=http://www.kemet.com/, ComponentLink2Description=Datasheet, ComponentLink2URL=http://www.kemet.com/kemet/web/homepage/kechome.nsf/vapubfilesname/F3102TA.pdf/$file/F3102TA.pdf, DatasheetDocument=Mar-2001, LatestRevisionDate=19-Mar-2004, LatestRevisionNote="Silkscreen size reduced.", Note="Footprint corresponds to dimensions for bulk cassette packaging. This case size has tightened tolerances.", PackageReference=0402, Published=17-Jul-2002, Publisher="Altium Limited"
C2 C31: library part Tant0805
C35: library part T495X, "Solid Tantalum Chip Capacitor, Standard T495 Series - Low ESR, Surge Robust", PackageDocument=Mar-2001, Code_JEITA=7343-43, ComponentLink1Description="Manufacturer Link", ComponentLink1URL=http://www.kemet.com/, ComponentLink2Description=Datasheet, ComponentLink2URL=http://www.kemet.com/kemet/web/homepage/kechome.nsf/vapubfilesname/F3102TA.pdf/$file/F3102TA.pdf, DatasheetDocument=Mar-2001, LatestRevisionDate=19-Mar-2004, LatestRevisionNote="Silkscreen dimensions re-sized.", PackageReference=X, PCB_Layout="Round Glue Pad at 2.9 ±0.1mm in diameter at KEMET's option", Published=17-Jul-2002, Publisher="Altium Limited"
C37 C38 C39 C43 C44 C45 C46: "Ceramic Chip Capacitor - Standard", PackageDocument=Mar-2001, ComponentLink1Description="Manufacturer Link", ComponentLink1URL=http://www.kemet.com/, ComponentLink2Description=Datasheet, ComponentLink2URL=http://www.kemet.com/kemet/web/homepage/kechome.nsf/vapubfilesname/F3102TA.pdf/$file/F3102TA.pdf, DatasheetDocument=Mar-2001, LatestRevisionDate=19-Mar-2004, LatestRevisionNote="Silkscreen size reduced.", Published=17-Jul-2002, Publisher="Altium Limited"
  C37: Code_IPC="1608 [0603]", Code_JEITA=0603, Note="Footprint corresponds to dimensions for bulk cassette packaging. This case size has tightened tolerances.", PackageReference=0603
  C38: 50V=1nF, Code_IPC="1608 [0603]", Code_JEITA=0603, Note="Footprint corresponds to dimensions for bulk cassette packaging. This case size has tightened tolerances.", PackageReference=0603
  C39 C44: 50V=10uF, Code_IPC="3216 [1206]", Code_JEITA=1206, PackageReference=1206
  C43: Code_IPC=2012[0805], Code_JEITA=0805, Note="Footprint corresponds to dimensions for bulk cassette packaging. This case size has tightened tolerances.", PackageReference=0805
  C45: Code_IPC="1005 [0402]", Code_JEITA=0402, Note="Footprint corresponds to dimensions for bulk cassette packaging. This case size has tightened tolerances.", PackageReference=0402
  C46: 6.3V=10uF, Code_IPC=2012[0805], Code_JEITA=0805, Note="Footprint corresponds to dimensions for bulk cassette packaging. This case size has tightened tolerances.", PackageReference=0805
C40 C41: "Solid Tantalum Chip Capacitor, Standard T495 Series - 35V 10%", PackageDocument=Mar-2001, Code_JEITA=7343-43, ComponentLink1Description="Manufacturer Link", ComponentLink1URL=http://www.kemet.com/, ComponentLink2Description=Datasheet, ComponentLink2URL=http://www.kemet.com/kemet/web/homepage/kechome.nsf/vapubfilesname/F3102TA.pdf/$file/F3102TA.pdf, DatasheetDocument=Mar-2001, LatestRevisionDate=19-Mar-2004, LatestRevisionNote="Silkscreen dimensions re-sized.", PackageReference=X, PCB_Layout="Round Glue Pad at 2.9 ±0.1mm in diameter at KEMET's option", Published=17-Jul-2002, Publisher="Altium Limited"
C42: "100V 20%", PackageDocument=Mar-2001, 100V, 20%=100nF, Code_IPC="1608 [0603]", Code_JEITA=0603, ComponentLink1Description="Manufacturer Link", ComponentLink1URL=http://www.kemet.com/, ComponentLink2Description=Datasheet, ComponentLink2URL=http://www.kemet.com/kemet/web/homepage/kechome.nsf/vapubfilesname/F3102TA.pdf/$file/F3102TA.pdf, DatasheetDocument=Mar-2001, LatestRevisionDate=19-Mar-2004, LatestRevisionNote="Silkscreen size reduced.", Note="Footprint corresponds to dimensions for bulk cassette packaging. This case size has tightened tolerances.", PackageReference=0603, Published=17-Jul-2002, Publisher="Altium Limited"
D1 D3: library part Diode_PMEG3050EP
D2: library part SMBJ24CA
D4: "Diode Schottky 100V 250mA (DC) Surface Mount SOD-323F", Package="SOD-323 NXP Semiconductors", Availability=Bad, MF="NXP Semiconductors", MP=BAT46WJ, Price=None, SnapEDA_Link=https://www.snapeda.com/parts/BAT46WJ/NXP%20Semiconductors/view-part/4222338/?ref=snap
FL1 FL2: "1ÂµF Feed Through Capacitor 100V 6A 5mOhm 1206 (3216 Metric), 4 PC Pad", Package="1206 TDK", Availability=Good, Check_prices=https://www.snapeda.com/parts/YFF31HC2A105MT000N/TDK-Lambda%20Americas%20Inc/view-part/566443/?ref=eda, MF=TDK, MP=YFF31HC2A105MT000N, Price=None, Purchase-URL=https://pricing.snapeda.com/search/part/YFF31HC2A105MT000N/?ref=eda, SnapEDA_Link=https://www.snapeda.com/parts/YFF31HC2A105MT000N/TDK-Lambda%20Americas%20Inc/view-part/566443/?ref=snap
L1: library part "Inductor 6.8uH", "Sumida Inductor", Supplier Part Number 1=308-1937-2-ND, Supplier 1=Digi-Key
L2: Supplier Part Number 1=1276-6902-1-ND, Supplier 1=Digi-Key
L3: library part Inductor_0630CDMCD
MP1: "RF Shield"
P1: "Header, 20-Pin, Dual row", LatestRevisionDate=17-Jul-2002, LatestRevisionNote="Re-released for DXP Platform.", Publisher="Altium Limited"
P2: library part microSD_Molex_hinged, Supplier Part Number 1=WM19081DKR-ND, Supplier 1=Digi-Key
P4 P10 P20: library part "Header 2", "Header, 2-Pin", LatestRevisionDate=17-Jul-2002, LatestRevisionNote="Re-released for DXP Platform.", Publisher="Altium Limited"
P5 P7 P15 P21: library part "Header 3", "Header, 3-Pin", LatestRevisionDate=17-Jul-2002, LatestRevisionNote="Re-released for DXP Platform.", Publisher="Altium Limited"
P6: library part IRIDIUM9603
P8: library part "Header 7", "Header, 7-Pin", LatestRevisionDate=17-Jul-2002, LatestRevisionNote="Re-released for DXP Platform.", Publisher="Altium Limited"
P9: library part "Header 9", "Header, 9-Pin", LatestRevisionDate=17-Jul-2002, LatestRevisionNote="Re-released for DXP Platform.", Publisher="Altium Limited"
P14: "Header, 4-Pin", LatestRevisionDate=17-Jul-2002, LatestRevisionNote="Re-released for DXP Platform.", Publisher="Altium Limited"
P23: library part "Header 5", "Header, 5-Pin", LatestRevisionDate=17-Jul-2002, LatestRevisionNote="Re-released for DXP Platform.", Publisher="Altium Limited"
P24 P25 P33: library part HDR_2x1_2mm
R1 R2 R3 R4 R5 R15: library part ERJ3RK, "Precision Thick Film Chip Resistor, 10 Ohm to 1M Ohm Range, 1% and 0.5% Tolerance, 0603 Size, 0.063 W", PackageDocument=Mar-2003, Code_IPC="1608 [0603]", ComponentLink1Description="Manufacturer Link", ComponentLink1URL=http://www.panasonic.com/industrial/components/resistive_products.htm, ComponentLink2Description=Datasheet, ComponentLink2URL=http://www.panasonic.com/industrial/components/pdf/AOA0000CE2.pdf, LatestRevisionDate=19-Mar-2004, LatestRevisionNote="Silkscreen size reduced.", PackageReference=3-0603, Published=17-Dec-2003, Publisher="Altium Limited"
R11: library part ERJ8EN, "Precision Thick Film Chip Resistor, 10 Ohm to 2.2M Ohm Range, 1% Tolerance, 1206 Size, 0.125 W", PackageDocument=Mar-2003, Code_IPC="3216 [1206]", ComponentLink1Description="Manufacturer Link", ComponentLink1URL=http://www.panasonic.com/industrial/components/resistive_products.htm, ComponentLink2Description=Datasheet, ComponentLink2URL=http://www.panasonic.com/industrial/components/pdf/AOA0000CE2.pdf, LatestRevisionDate=19-Mar-2004, LatestRevisionNote="Silkscreen size reduced.", PackageReference=8-1206, Published=17-Dec-2003, Publisher="Altium Limited"
U1: "3 Circuit IC Switch 2:2 4Ohm 24-TQFN (4x4)", Package="TQFN-24 Maxim", Availability=Warning, Check_prices=https://www.snapeda.com/parts/MAX4996ETG+/Maxim%20Integrated/view-part/1193961/?ref=eda, MF="Maxim Integrated", MP=MAX4996ETG+, Price=None, Purchase-URL=https://pricing.snapeda.com/search/part/MAX4996ETG+/?ref=eda, SnapEDA_Link=https://www.snapeda.com/parts/MAX4996ETG+/Maxim%20Integrated/view-part/1193961/?ref=snap
U2 U4 U5 U9 U10: "Micropower, 150mA Low-Noise Ultra Low-Dropout CMOS Voltage Regulator", DigiKeyPartNumber=LP3985IM5-3.3CT-ND, Manufacturer="National Semiconductor", PackageTopMarking=LDQB*XTT, PowerWise=N, ComponentLink1Description="LP3985 Datasheet", ComponentLink1URL=http://www.national.com/ds/LP/LP3985.pdf, ComponentLink2Description="LP3985 Web Page", ComponentLink2URL=http://www.national.com/pf/LP/LP3985.html, ComponentLink3Description="MF05A Package Page", ComponentLink3URL=http://www.national.com/packaging/folders/mf05a.html, CompType="LDO IC", DatasheetVersion=Aug-2005, PackageDescription="Molded SOT-23, .115 x .063 x .040 in Body, 5 Lead, .0375 in Pitch", PackageReference=MF05A, PackageVersion="revD, Aug-2008", PartNumber=LP3985IM5-3.3, PinCount=5, Published=4-Dec-2008, Publisher="Altium Limited", RoHS=O
U6: library part ADXL345
U7: "magnetometer"
U8: "Single Output LDO, 200 mA, Fixed 1.8 V Output, 2 to 5.5 V Input, with Low IQ, 5-pin SC70 (DCK), -40 to 125 degC, Green (RoHS & no Sb/Br)", Manufacturer="Texas Instruments", Supplier Part Number 1=296-32409-2-ND, Accuracy(%)=2, Code_JEDEC=MO-203, ComponentLink1Description="Manufacturer URL", ComponentLink1URL=http://www.ti.com/, ComponentLink2Description=Datasheet, ComponentLink2URL=http://www.ti.com/general/docs/lit/getliterature.tsp?genericPartNumber=TLV70018&fileType=pdf, ComponentLink3Description="Package Specification", ComponentLink3URL=http://www.ti.com/litv/pdf/mpds025f, DatasheetVersion=SLVSA00D, Eco-Plan="Green (RoHS & no Sb/Br)", Fixed Output Options(V)=1.8, Iout(Max)(A)=0.2, Iq(Typ)(mA)=0.03, Mounting Technology="Surface Mount", PackageDescription="5-Pin Plastic Small-Outline, Body 2 x 1.25 mm, Pitch 0.65 mm", PackageReference=DCK5, PackageVersion=4093553-3/G, PartNumber=TLV70018DCKR, SubFamily="Single Channel LDO", Supplier 1=Digi-Key, Supplier 2=Digi-Key, Supplier 3=Digi-Key, Supplier 4=Newark, Supplier 5=Mouser, Supplier Part Number 2=296-32409-1-ND, Supplier Part Number 3=296-32409-6-ND, Supplier Part Number 4=55R7461, Supplier Part Number 5=595-TLV70018DCKR, Vdo(Typ)(mV)=175, Vin(Max)(V)=5.5, Vin(Min)(V)=2, Vout Adj(Max)(V)=1.8, Vout Adj(Min)(V)=1.8
U11: library part "GPS SAM-M8Q"
U12: library part TPS6103x, "Boost converter", Supplier 1=Newark, Supplier 2=Digi-Key, Supplier Part Number 2=296-14418-1-ND
U13: "Power Tracking 2A Battery Charger for Solar Power", Package=None, Availability=Unavailable, MP=LT3652EDDPBF, Price=None

## Free pads (board coordinates)
  round 157.48 hole 108.27: 0(378.31,-4891.1) 0(378.31,-2607.64) 0(2307.44,-4891.1) 0(2307.44,-2607.64)
  round 221 hole 221: 1(3627.44,-5697.64) 1(5180,-3221.38) 1(6752.44,-2572.64)
  round 118.11 hole 221: 1(4649.84,-1111.97) 1(4649.84,-206.46) 1(5572.44,-3261.1) 1(5572.44,-977.64) 1(6477.95,-3261.1) 1(6477.95,-977.64) 1(6933.31,-1111.97) 1(6933.31,-206.46)
  round 39.37 smd: 10(0,-5195) 10(0,0) 10(7290,-5195) 10(7290,0)

## Via types
v1: diameter 50, hole 28, Top Layer to Bottom Layer, tented both sides, 63 vias
v2: diameter 28, hole 15, Top Layer to Bottom Layer, tented both sides, 61 vias
v3: diameter 50, hole 28, Top Layer to Bottom Layer, 22 vias
v4: diameter 40, hole 16, Top Layer to Bottom Layer, tented both sides, 4 vias
v5: diameter 19.68, hole 7.87, Top Layer to Bottom Layer, 4 vias
v6: diameter 38, hole 16, Top Layer to Bottom Layer, tented both sides, 2 vias
v7: diameter 40, hole 16, Top Layer to Bottom Layer, 1 vias

## Nets (pads, with @x,y where several pads share a name; then routed paths per layer and width w, separated by ;. In a path a pad name is that pad's centre, name@x,y a point inside that pad or via, vN(x,y) a via of type N, cw(c..) or ccw(c..) an arc to the next point about the centre after c; other vN are vias at no path point)
3V3: 6.1 8.1 C1.1 C18.1 C21.1 C22.1 P3.3.3V P14.1 P23.1 R5.2 R15.2 U1.14 U6.1 U6.6 U6.7 U7.5 U7.6 U7.10 | length 2419.1
  Top Layer w6: v6(2190,-599.88) 2201.91,-599.88 2216.79,-585 6.1@2256.54,-585 8.1@2256.54,-645 ; U1.14@2998.19,-2947.64 2998.19,-2856.88 3008.97,-2846.1 C1.1@3012.72,-2846.1 3025,-2835.32 v1(3025,-2770) ; U6.6@4582.44,-4227.13 4582.44,-4261.24 4590.37,-4269.17 ; U6.1@4582.44,-4069.65 4419.76,-4069.65 4388.31,-4101.1 4388.31,-4231.1 4428.31,-4271.1 4483.31,-4271.1 4485.24,-4269.17 4590.37,-4269.17 ; U7.5@4609.09,-4444.29 4609.09,-4472.82 4628.78,-4492.5 ; U6.7@4625.65,-4230.96 4625.65,-4268.45 4634.31,-4277.1 ; U7.6@4628.78,-4444.29 4628.78,-4492.5 ; U7.10@4650.43,-4383.27 4651.21,-4384.05 4766.25,-4384.05 v1(4768.31,-4386.1) ; v1(4733.31,-4481.1) 4728.31,-4486.1 4728.31,-4531.1 4717.36,-4542.05 C21.1@4687.44,-4542.05 C22.1@4627.44,-4542.05 4628.78,-4540.71 4628.78,-4492.5 ; C18.1@4758.31,-4281.1 4638.31,-4281.1 4634.31,-4277.1 ; C18.1@4763.31,-4271.69 4812.72,-4271.69 v1(4838.31,-4246.1) ; 4590.37,-4269.17 4598.31,-4277.1 4634.31,-4277.1
  Top Layer w8: P14.1@3213.31,-6231.1 3486.02,-6231.1 ccw(c3486.02,-6223.1) 3491.66,-6228.77 3780,-5940.43 R15.2@3780,-5938.46 R5.2@3845,-5938.46
4V2: C38.2 FL2.3 P15.2 P21.1 P23.5 P33.1 R3.2 | length 5497.9
  Top Layer w8: P23.5@1980,-1130 2955,-1130 3310,-775 3310,-384.69 3305.31,-380 3157.83,-380 FL2.3@3155,-377.17 ; C38.2@3997.44,-31.1 4144.99,-31.1 cw(c4144.99,-39.1) 4150.65,-33.45 4183.31,-66.1 4258.98,-66.1 P21.1@4262.44,-62.64 ; 4190,-1287.44 4190,-1415 4215,-1440 4445,-1440 4451.69,-1433.31 R3.2@4451.69,-1388.9
  Top Layer w20: FL2.3@3155,-377.17 3155,-343.22 cw(c3175,-343.28) 3160.8,-329.2 3251.63,-238.37 cw(c3265.77,-252.52) 3251.68,-238.32 3481.54,-8.46 cw(c3495.65,-22.64) 3495.58,-2.64 3495.65,-2.64 P33.1@3592.44,-2.64
  Top Layer w50: P33.1@3592.44,-2.64 3594.17,-4.37 3594.17,-71.81 3623.46,-101.1 4048.31,-101.1 4128.31,-181.1 4252.44,-181.1 4262.44,-191.1 ; P15.2@4122.44,-1287.64 4122.64,-1287.44 4190,-1287.44 4226.97,-1287.44 4247.8,-1266.61 ccw(c4212.44,-1231.26) 4262.44,-1231.26 4262.44,-191.1 ; P21.1@4262.44,-62.64 4262.44,-191.1
5V_ENABLE: P3.15 U12.9 | length 3472.5
  Top Layer w6: v3(3093.31,-1951.1) 3097.54,-1946.87 3233.9,-1946.87 U12.9@3233.9,-1872.05
  Bottom Layer w8: v3(3093.31,-1951.1) 3188.31,-2046.1 3188.31,-2437.91 3290.31,-2539.91 3290.31,-3537.62 cw(c3277.31,-3545.1) 3292.31,-3545.1 3292.31,-3573.48 cw(c3284.31,-3573.44) 3291.78,-3576.31 ccw(c3358.31,-3601.1) 3291.83,-3626.03 cw(c3284.31,-3628.76) 3292.31,-3628.76 3292.31,-3788.36 ccw(c3300.31,-3788.36) 3293.48,-3792.53 cw(c3286.65,-3796.69) 3294.65,-3796.69 3294.65,-4010.5 ccw(c3302.65,-4010.5) 3296.99,-4016.16 3312.22,-4031.38 cw(c3306.56,-4037.04) 3313.14,-4032.48 ccw(c3358.31,-4001.1) 3326.95,-4046.29 3328.02,-4047.19 3338.49,-4057.66 ccw(c3344.15,-4052) 3344.15,-4060 3483.89,-4060 cw(c3483.89,-4068) 3489.55,-4062.34 3763.87,-4336.67 ccw(c3769.53,-4331.01) 3769.53,-4339.01 3911.22,-4339.01 cw(c3911.22,-4354.01) 3921.83,-4343.41 3932.21,-4353.79 ccw(c3937.83,-4348.1) 3937.79,-4356.1 3998.62,-4356.1 4003.31,-4360.79 4003.31,-4556.1 P3.15@3958.31,-4601.1
AGND: C4.2 C5.2 C6.2 C7.2 C8.2 C9.2 C10.2 C11.2 C12.2 C13.2 C14.2 C15.2 C16.2 C23.2 C24.2 P4.1 P5.3 P7.3 U2.2 U3.1 U3.3 U3.7 U3.15 U3.31 U3.32 U3.33 U4.2 U5.2 U8.2 | length 3245.6
  Top Layer w6: C10.2@4563.9,-3216.1 4563.9,-3143.62 U4.2@4564.33,-3143.19 ; U3.31@5056.73,-2346.89 U3.32@5056.73,-2327.2
  Top Layer w8: C9.2@4525.2,-2918.82 4559.64,-2918.82 4564.33,-2923.51 ; v1(4563.31,-2856.1) 4564.33,-2857.13 4564.33,-2923.51 ; C12.2@4605.2,-2923.82 4564.64,-2923.82 4564.33,-2923.51 ; v1(4606.77,-1963.37) 4607.64,-1964.24 4716.46,-1964.24 ; v1(4713.31,-2611.1) 4808.31,-2516.1 4808.31,-2450 4812.99,-2445.32 U3.15@4859.88,-2445.32 ; C7.2@4716.18,-1928.37 4716.18,-1963.96 4716.46,-1964.24 ; C5.2@4716.46,-2003.09 4716.46,-1964.24 ; C15.2@4763.31,-3046.69 4767.72,-3051.1 4798.31,-3051.1 4832.44,-3016.97 U5.2@4832.44,-2909.88 ; C13.2@4783.31,-2285.51 4783.31,-2238.43 4808.31,-2213.43 v1(4808.31,-2211.1) 4812.21,-2211.1 4836.42,-2235.32 4909.09,-2235.32 U3.7@4909.09,-2297.68 4909.09,-2346.89 U3.33@4958.31,-2396.1 ; C14.2@4793.31,-2685.51 4793.9,-2686.1 4827.75,-2686.1 4832.44,-2690.79 ; C11.2@4867.72,-2571.1 4867.72,-2596.69 v1(4833.31,-2631.1) 4832.44,-2631.97 4832.44,-2690.79 ; C16.2@4873.31,-2690.51 4832.72,-2690.51 4832.44,-2690.79 ; C8.2@4953.31,-2170.51 5032.72,-2170.51 v1(5088.31,-2226.1) ; U3.3@4987.83,-2297.68 4987.83,-2251.57 5027.83,-2251.57 ; U3.1@5027.2,-2297.68 5027.2,-2252.2 5027.83,-2251.57 ; U3.32@5056.73,-2327.2 5087.2,-2327.2 5093.31,-2321.1 5093.31,-2231.1 v1(5088.31,-2226.1) ; C6.2@5082.36,-2003.37 5088.31,-2009.32 v1(5088.31,-2226.1) ; v1(5143.31,-2121.1) C24.2@5143.31,-2200.51 C24.2@5143.9,-2201.1 ; C4.2@5183.9,-2351.1 v1(5283.31,-2351.1) ; U8.2@5286.61,-2201.1 5331.65,-2201.1 5343.31,-2189.45 C23.2@5343.31,-2185.51 ; 5027.83,-2251.57 5051.31,-2228.1 5086.31,-2228.1 v1(5088.31,-2226.1)
  Top Layer w12: U4.2@4564.33,-3143.19 4564.33,-2923.51 ; 4716.46,-1964.24 U2.2@4945.55,-1964.24 ; U5.2@4832.44,-2909.88 4832.44,-2690.79 ; C24.2@5143.9,-2201.1 U8.2@5286.61,-2201.1
BAT: 13.1 C46.2 D4.A FL2.1 R11.2 U13.9 | length 1497.3
  Top Layer w8: 13.1@2257.44,-771.1 2257.44,-827.44 2265,-835 2345,-835 2370,-810 2394.96,-810 R11.2@2417.32,-787.64 2415.04,-785.35 C46.2@2415.04,-697.64 2420.31,-692.36 2420.31,-648.15 cw(c2428.31,-648.15) 2428.65,-640.15 v4(2545,-645) ; U13.9@2534.44,-556.64 2552.09,-556.64 cw(c2552.09,-564.64) 2557.74,-558.97 2562.64,-563.88 cw(c2557.04,-569.59) 2565,-568.75 ; v4@2561.64,-638.67 cw(c2556.04,-632.96) 2558.54,-640.56 2546.41,-644.54 v4(2545,-645) ; v4@2561.67,-638.65 2565,-635.31 2565,-568.77 ; D4.A@2607.44,-737.91 2577.91,-737.91 2547.34,-707.34 cw(c2553.03,-701.71) 2545.03,-701.68 2545,-650.8 v4(2545,-645) ; FL2.1@3152.83,-525 FL2.1@3155,-522.83
  Top Layer w20: v3(3070,-645) 3070,-535 3080,-525 FL2.1@3152.83,-525
  Bottom Layer w40: v4(2545,-645) v3(3070,-645)
BCLK: P3.9 U3.24 | length 4263.1
  Top Layer w8: P3.9@3358.31,-4501.1 3404.99,-4501.1 cw(c3404.99,-4509.1) 3410.65,-4503.45 3410.65,-5068.45 3433.31,-5091.1 3853.31,-5091.1 3905.96,-5038.45 ccw(c3900.31,-5032.79) 3908.31,-5032.79 3908.31,-4776.1 3943.31,-4741.1 4129.99,-4741.1 ccw(c4129.99,-4733.1) 4135.64,-4738.77 4160.99,-4713.42 ccw(c4155.31,-4707.79) 4163.31,-4707.79 4163.31,-3850.9 5027.2,-2987 U3.24@5027.2,-2494.53
BOOST: C45.1 D4.C U13.11 | length 212.5
  Top Layer w8: U13.11@2534.44,-520.64 2569.36,-520.64 2578.12,-529.39 cw(c2572.46,-535.05) 2578.95,-530.37 2581.05,-533.28 ccw(c2587.54,-528.6) 2581.84,-534.22 2586.5,-538.87 ccw(c2592.12,-533.18) 2587.06,-539.38 2589.26,-541.17 cw(c2584.2,-547.37) 2589.84,-541.69 2607.44,-559.29 ; D4.C@2607.44,-647.36 2607.44,-559.29 ; C45.1@2640,-565.59 2613.74,-565.59 2607.44,-559.29
CHRG: 6.2 P23.3 U13.4 | length 1057.9
  Top Layer w6: v4(2196.64,-540.25) 2203.39,-547 2230.64,-547 2233.64,-550 2319.95,-550 2323.46,-553.51 6.2@2323.46,-585
  Top Layer w8: 6.2@2335.91,-577.64 2359.05,-577.64 ccw(c2359.05,-569.64) 2364.69,-575.31 2381.03,-558.97 cw(c2386.68,-564.64) 2386.64,-556.64 ; 2386.68,-556.64 U13.4@2420.44,-556.64
  Bottom Layer w6: P23.3@1780,-1130 1780,-890 2129.75,-540.25 v4(2196.64,-540.25)
CS: P3.10 U1.11 | length 1953.4
  Top Layer w6: U1.11@3042.68,-2992.13 3107.28,-2992.13 3143.31,-2956.1 v1(3143.31,-2911.1)
  Top Layer w8: v1(3183.31,-3096.1) 3166.72,-3112.69 3166.72,-3244.32 3245.02,-3322.61 ; 3247.36,-3328.09 3247.36,-3765.71 3266.31,-3784.66 3266.31,-4509.1 P3.10@3358.31,-4601.1 ; 3266.32,-4215.81 ccw(c3306.31,-4214.99) 3266.98,-4222.28
  Bottom Layer w6: v1(3143.31,-2911.1) 3183.31,-2951.1 v1(3183.31,-3096.1)
DGND: 7.1 C1.2 C2.1 C3.2 C18.2 C20.1 C21.2 C22.2 C25.2 C26.2 C27.2 C28.2 C29.1 C30.1 C31.1 C35.2 C36.2 C37.1 C38.1 C39.1 C40.2 C41.2 C42.1 C43.1 C44.1 C46.1 D2.2 D3.A FL1.2_4 FL2.2_4 P1.6 P1.9 P1.14 P1.20 P1.25 P1.30 P1.34 P1.39 P2.6 P3.GND P4.2 P6.3 P6.4 P6.8 P6.15 P6.18 P8.7 P9.3 P14.2 P20.2 P21.3 P23.2 P24.2 P25.2 P33.2 R2.1 R4.1 R14.1 U1.13 U1.15 U6.2 U6.4 U6.5 U6.12 U7.2 U7.3 U7.9 U7.12 U9.2 U10.2 U11.1 U11.4 U11.5 U11.6 U11.10 U11.11 U11.15 U11.16 U11.20 U12.3 U12.4 U12.5 U12.7 U12.8 U12.11 U12.17 U13.6 U13.13 | length 10265.8
  Top Layer w6: v1(2975,-2670) 2980.68,-2675.68 cw(c2976.44,-2679.93) 2982.44,-2679.93 U1.15@2982.44,-2947.64 ; U1.13@3013.94,-2947.64 3013.94,-2915.47 3063.9,-2865.51 C1.2@3063.9,-2846.1 3108.31,-2846.1 3128.31,-2826.1 v1(3128.31,-2791.1) ; v1(3018.31,-3696.1) 3018.31,-3934.49 P2.6@3019.92,-3936.1 ; v3(3113.31,-1531.1) 3202.44,-1531.1 C37.1@3203.98,-1532.64 3198.31,-1538.31 3198.31,-1636.1 3209.84,-1647.64 U12.8@3233.9,-1647.64 U12.7@3259.49,-1647.64 ; C36.2@3281.85,-2017.64 3285.08,-2014.41 U12.11@3285.08,-1872.05 ; U12.5@3310.67,-1647.64 3310.67,-1573.74 3323.31,-1561.1 v3@3338.31,-1561.1 ; U12.4@3336.26,-1647.64 3336.26,-1563.15 v3@3338.31,-1561.1 ; v3(3348.31,-1541.1) 3343.51,-1555.04 cw(c3337.84,-1553.09) 3342.08,-1557.33 v3@3338.31,-1561.1 ; U12.3@3361.85,-1647.64 3361.85,-1584.65 v3@3338.31,-1561.1 ; v1(4438.31,-4195) 4438.31,-4161.1 ; v1@4503.31,-4336.1 4508.31,-4336.1 v1(4513.31,-4331.1) 4583.31,-4331.1 4609.09,-4356.89 U7.12@4609.09,-4381.3 ; C20.1@4567.44,-4593.23 C22.2@4627.44,-4593.23 C21.2@4687.44,-4593.23 4689.57,-4591.1 v1(4793.31,-4591.1) 4793.31,-4487.36 4708.9,-4402.95 U7.9@4650.43,-4402.95 ; U6.5@4582.44,-4195.63 4537.83,-4195.63 4506.34,-4164.13 ; U6.4@4582.44,-4164.13 4506.34,-4164.13 ; U6.2@4582.44,-4101.14 4498.27,-4101.14 4438.31,-4161.1 ; U7.3@4587.44,-4422.64 4584.54,-4419.73 4501.94,-4419.73 v1(4498.31,-4416.1) 4511.46,-4402.95 U7.2@4587.44,-4402.95 ; U6.12@4668.86,-4101.14 4738.35,-4101.14 v1@4760.26,-4123.05 ; C18.2@4763.31,-4220.51 4763.31,-4126.1 v1@4760.26,-4123.05 ; v1(4763.31,-4120) v1@4760.26,-4123.05 ; 5517.32,-3877.09 P6.18@5517.32,-3826.1 ; P6.15@5533.07,-3642.24 5533.07,-3546.34 v1(5533.31,-3546.1) ; 5596.06,-3933.35 P6.8@5596.06,-3826.1 ; 5627.56,-3880.35 P6.4@5627.56,-3826.1 ; P6.3@5627.56,-3642.24 5627.56,-3591.85 5658.31,-3561.1 v1(5678.31,-3561.1) ; 4438.31,-4161.1 4503.31,-4161.1 4506.34,-4164.13
  Top Layer w8: D2.2@555,-560 700,-560 757.44,-502.56 C42.1@757.44,-416.1 ; v3(1300,-100) 1397.2,-100 C43.1@1402.44,-105.24 ; C41.2@1752.44,-648.62 C41.2@1755,-651.18 ; 2097.91,-785 2099.45,-783.46 R14.1@2195,-783.46 ; C39.1@2244.88,-320 2244.88,-412.67 2219.88,-437.67 v7(2219.88,-440) 2219.88,-494.88 2226.95,-501.95 2253.29,-501.95 7.1@2268.98,-517.64 ; U13.6@2420.44,-591.64 2421.44,-590.64 2448.94,-590.64 2477.44,-562.14 U13.13@2477.44,-547.64 2480,-545.08 v4(2480,-445) ; C46.1@2475,-712.48 C46.1@2489.84,-697.64 2489.84,-735.16 2475,-750 2475,-865.88 2500.32,-891.21 ; 2488.82,-222.68 2484.41,-227.09 2484.41,-440.59 v4(2480,-445) ; 2530,-222.68 2530.76,-221.91 2532.5,-220.18 2532.5,-127.5 v3(2535,-125) ; D3.A@2545.83,-367.64 2545.83,-389.29 2490.12,-445 v4(2480,-445) ; C27.2@2702.72,-4496.1 2653.31,-4496.1 v3(2618.31,-4531.1) 2835.71,-4531.1 U10.2@2839.17,-4534.57 ; 2964.06,-445 2969.06,-450 FL2.2_4@3155,-450 ; 3073.62,-4534.57 3078.31,-4529.88 ; C30.1@3073.9,-4571.1 3076.55,-4568.45 ccw(c3070.9,-4562.79) 3078.9,-4562.79 3078.9,-4548.68 ; 3078.9,-4534.57 3078.9,-4548.68 ; C28.2@3078.9,-4496.1 3078.9,-4548.68 ; C35.2@3086.46,-2182.64 3086.46,-2097.95 3108.31,-2076.1 v3(3223.31,-2076.1) 3230.31,-2069.1 3260.31,-2069.1 3268.31,-2061.1 3268.31,-2027.42 3278.09,-2017.64 C36.2@3281.85,-2017.64 ; R2.1@3591.69,-5257.36 3593.23,-5258.9 v3(3691.69,-5258.9) ; C3.2@3898.31,-1335.51 3977.4,-1335.51 C2.1@3978.31,-1334.6 3973.31,-1329.6 v3(3973.31,-1191.1) ; C38.1@3997.44,35.83 4050.24,35.83 4148.31,133.9 P21.3@4268.31,133.9 ; C29.1@4092.44,-6033.07 4097.44,-6038.07 C26.2@4172.44,-6038.07 4170.47,-6036.1 4137.13,-6036.1 4132.44,-6031.42 U9.2@4132.44,-5820.24 4132.44,-5746.25 4124.38,-5738.18 ; 4124.35,-5738.16 cw(c4130.03,-5732.53) 4123.13,-5736.57 v1(4093.31,-5686.1) 4133.62,-5671.1 4171.65,-5671.1 C25.2@4172.44,-5671.89 ; v3(4245,-1390) 4375.59,-1390 R4.1@4376.69,-1388.9 R4.1@4371.69,-1383.9 ; C31.1@4308.31,-5934.6 4364.81,-5934.6 4413.31,-5886.1 P9.3@4493.31,-5886.1 4688.31,-5886.1 4728.9,-5845.51 U11.15@4843.62,-5845.51 ; v1(5473.31,-3921.1) 5517.32,-3877.09 ; v1(5568.31,-3961.1) 5596.06,-3933.35 ; 5627.56,-3880.35 v1(5663.31,-3916.1)
  Top Layer w12: U10.2@2844.17,-4534.57 3073.62,-4534.57
  Top Layer w15: FL1.2_4@1162.44,-457.64 1252.64,-457.64 1270,-475 1270,-775 1320,-825 1460,-825 ; C40.2@1397.44,-643.62 1397.44,-767.44 1450,-820 v3(1755,-820) ; C41.2@1755,-651.18 v3(1755,-820) ; C44.1@1927.44,-507.76 1927.44,-647.56 v3(1755,-820)
  Top Layer w20: P25.2@287.44,-417.64 357.64,-417.64 495,-555 D2.2@582.44,-555
  other v2: 4612.44,-6147.64 4712.44,-6147.64 4812.44,-6147.64 4912.44,-6147.64 5012.44,-6147.64 5512.44,-6147.64 5612.44,-6147.64 5262.44,-6047.64 5362.44,-6047.64 5562.44,-6047.64 5662.44,-6047.64 4612.44,-5947.64 4712.44,-5947.64 4812.44,-5947.64 5412.44,-5947.64 5612.44,-5947.64 4562.44,-5847.64 4662.44,-5847.64 4962.44,-5847.64 5062.44,-5847.64 5162.44,-5847.64 5262.44,-5847.64 5462.44,-5847.64 5562.44,-5847.64 5662.44,-5847.64 4912.44,-5747.64 5012.44,-5747.64 5112.44,-5747.64 5212.44,-5747.64 5512.44,-5747.64 5612.44,-5747.64 4562.44,-5647.64 4662.44,-5647.64 4962.44,-5647.64 5062.44,-5647.64 5162.44,-5647.64 5262.44,-5647.64 5462.44,-5647.64 5562.44,-5647.64 5662.44,-5647.64 4712.44,-5547.64 5012.44,-5547.64 5112.44,-5547.64 5212.44,-5547.64 5512.44,-5547.64 5612.44,-5547.64 4762.44,-5447.64 4862.44,-5447.64 5362.44,-5447.64 5462.44,-5447.64 5562.44,-5447.64 5662.44,-5447.64 4712.44,-5347.64 4812.44,-5347.64 4912.44,-5347.64 5112.44,-5347.64 5212.44,-5347.64 5312.44,-5347.64 5412.44,-5347.64 5512.44,-5347.64 5612.44,-5347.64
  other v5: 3301.81,-1781.5 3345.12,-1781.5 3301.81,-1738.19 3345.12,-1738.19
FAULT: 8.2 P23.4 U13.5 | length 910
  Top Layer w6: v6(2190,-659.88) 2190,-660 2208.24,-678.24 ccw(c2212.49,-674) 2212.49,-680 2317.5,-680 ccw(c2317.46,-674) 2323.46,-674 8.2@2323.46,-645
  Top Layer w8: 8.2@2333.46,-640 2370,-640 2380,-630 2380,-590 2395.36,-574.64 U13.5@2420.44,-574.64
  Bottom Layer w6: P23.4@1880,-1130 1880,-969.88 v6(2190,-659.88)
GPIO22: P1.15 U1.22 | length 1665.8
  Top Layer w6: P1.15@2258.31,-4001.1 2150.53,-4001.1 cw(c2150.57,-3995.1) 2144.57,-3995.1 cw(c2150.57,-3995.1) 2144.57,-3994.98 2152.77,-3647.56 cw(c2158.77,-3647.72) 2153.24,-3645.39 2153.39,-3645.04 cw(c2158.92,-3647.36) 2158.84,-3641.36 2358.93,-3638.62 ccw(c2358.31,-3601.1) 2374.28,-3635.06 2536.55,-3558.72 ccw(c2534,-3553.29) 2540,-3553.29 2540,-3207.45 cw(c2546,-3207.49) 2541.73,-3203.27 2719.64,-3025.36 cw(c2723.86,-3029.62) 2723.86,-3023.62 U1.22@2906.46,-3023.62